# Altium PCB rNET_POE_Sensor_RevA1.PCBDOC (part 1 of 3)
Units mil, origin at the board's own origin, x right, y up, seen from the top; angles counter-clockwise.
Board outline 3750 x 2245 mil, 6 copper layers (TopLayer, Mid Layer 1, Mid Layer 2, Mid Layer 3, Mid Layer 4, BottomLayer), stack 60.4 mil thick; 269 components, 206 nets, 1048 pads, 579 vias.
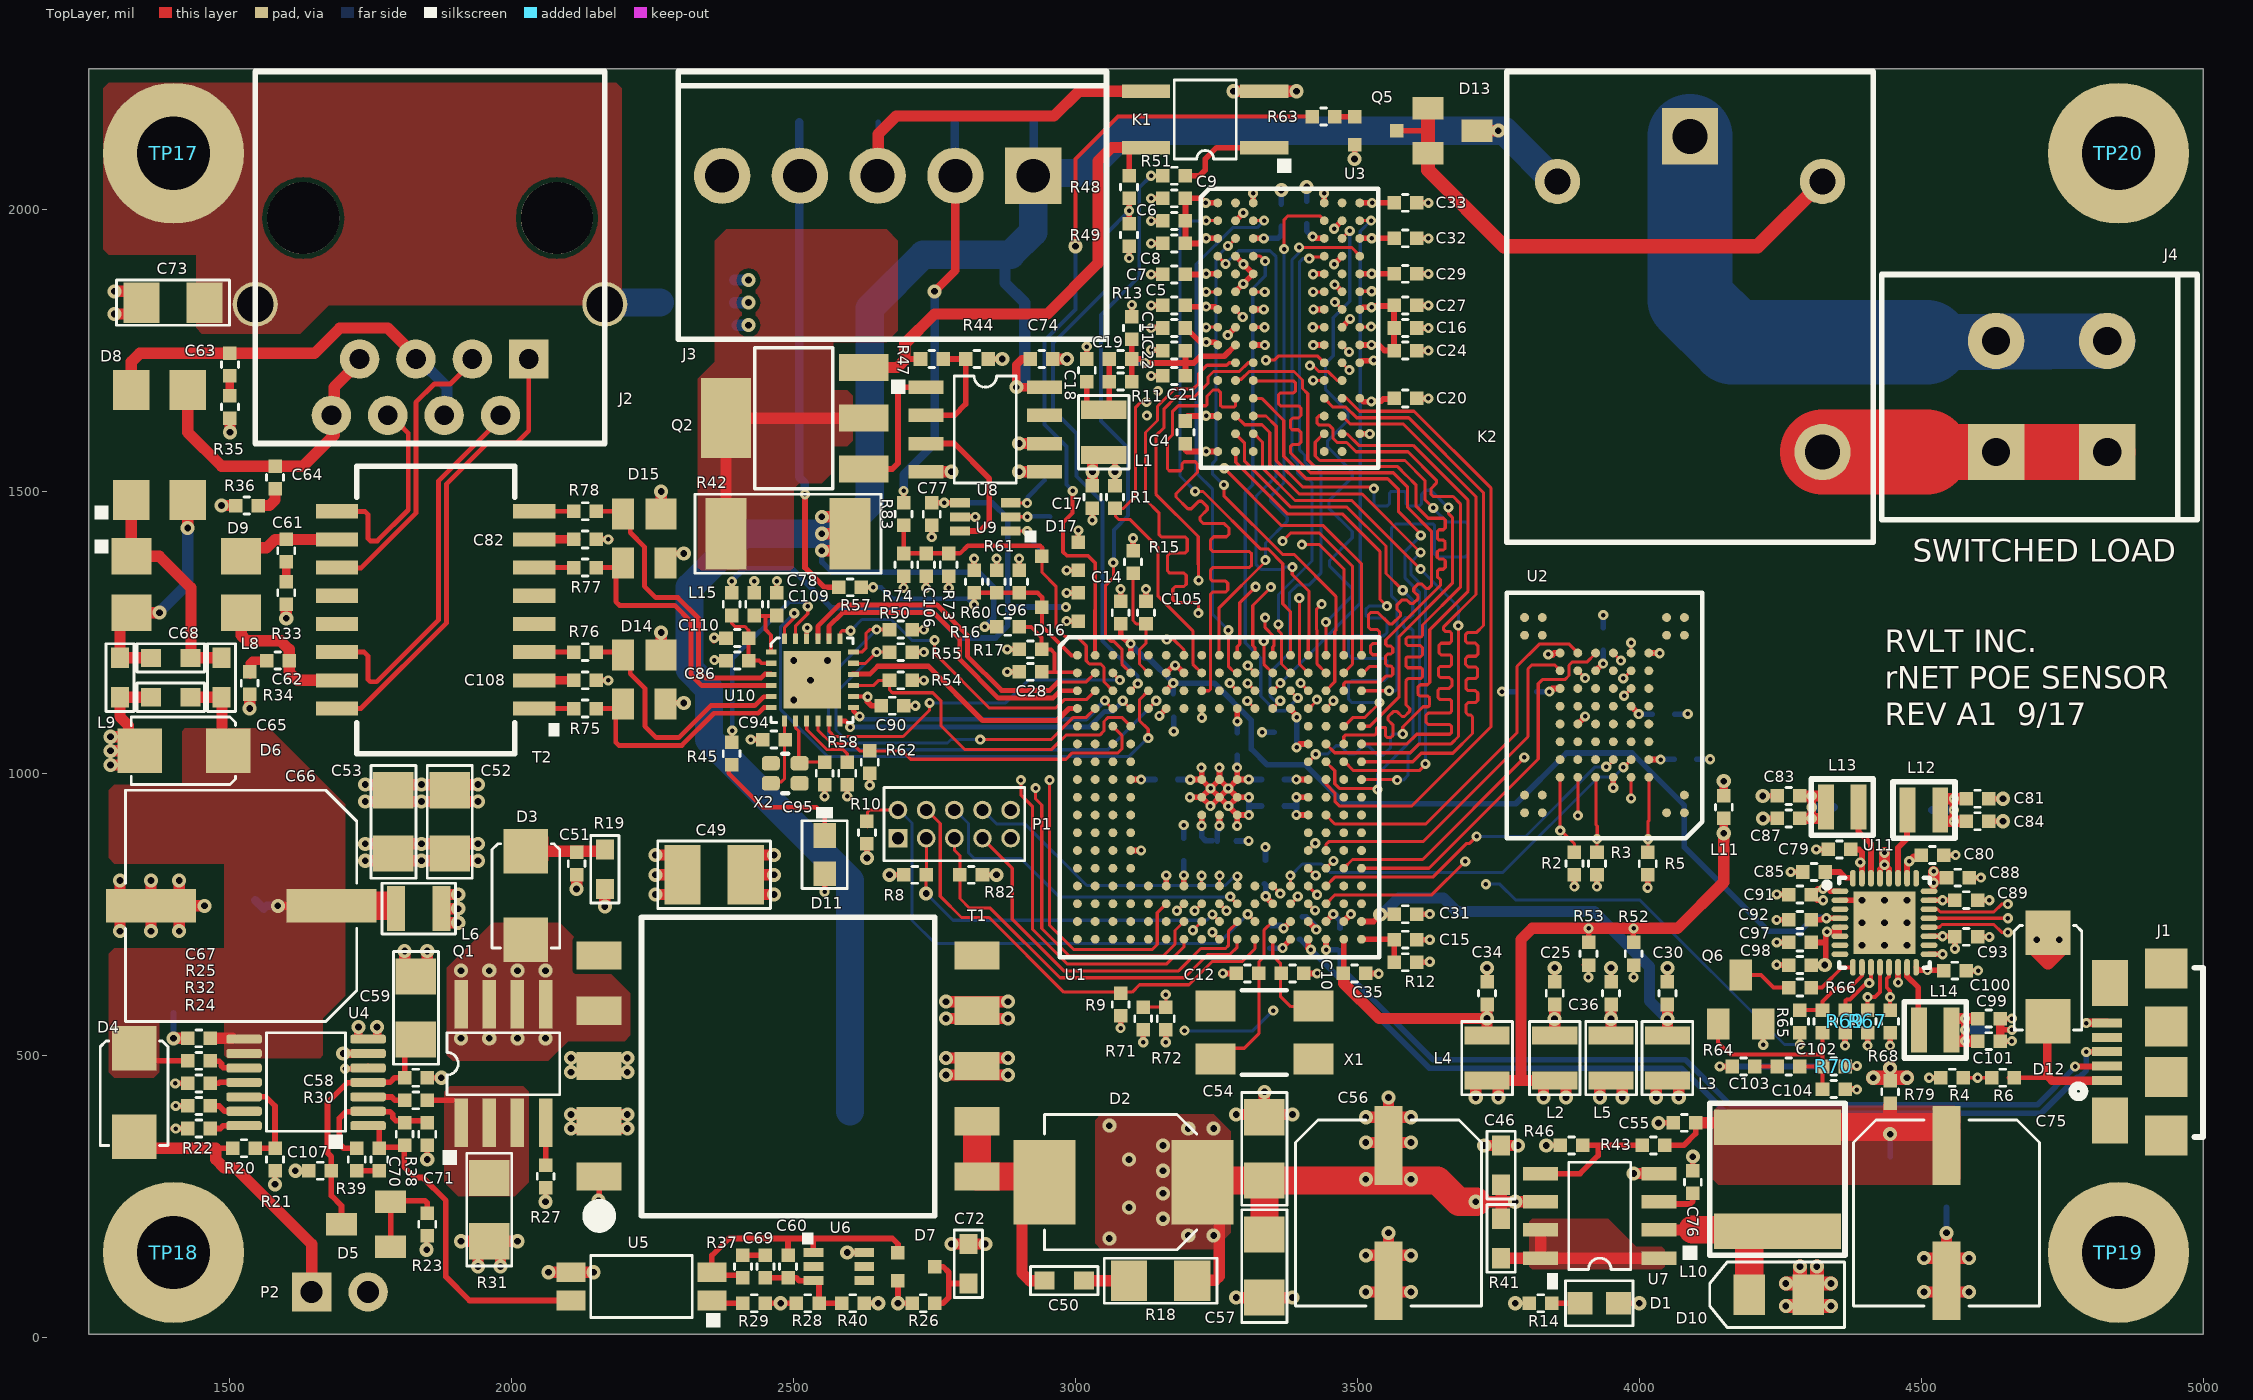
[diagram p0: TopLayer view]
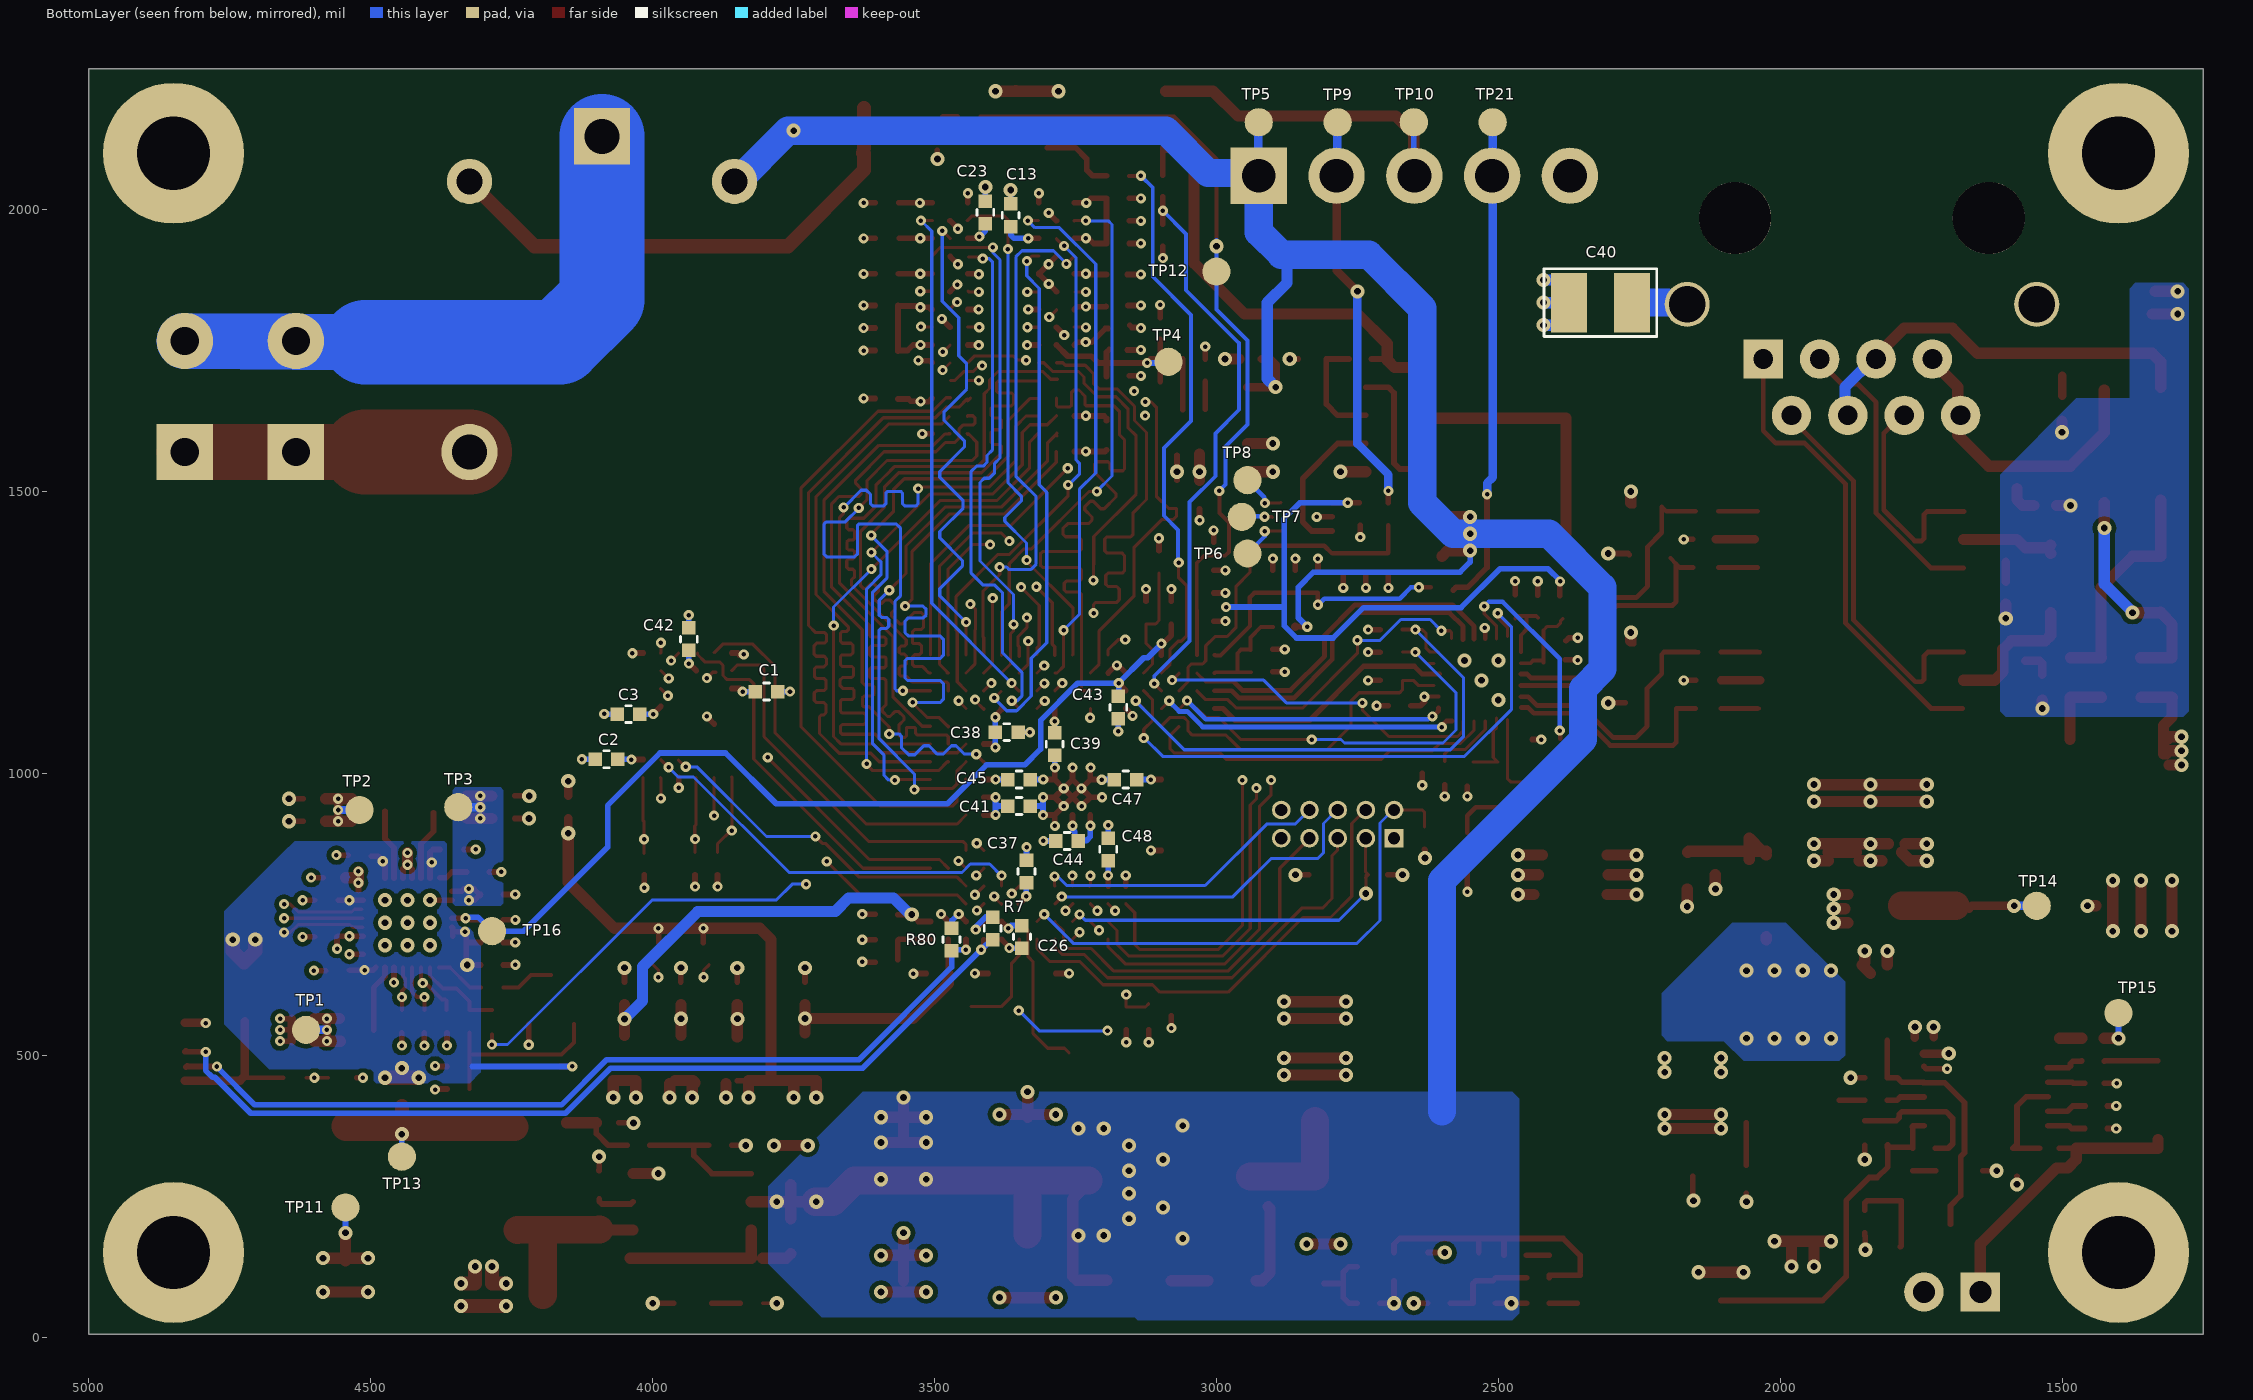
[diagram p1: BottomLayer view, seen from below]
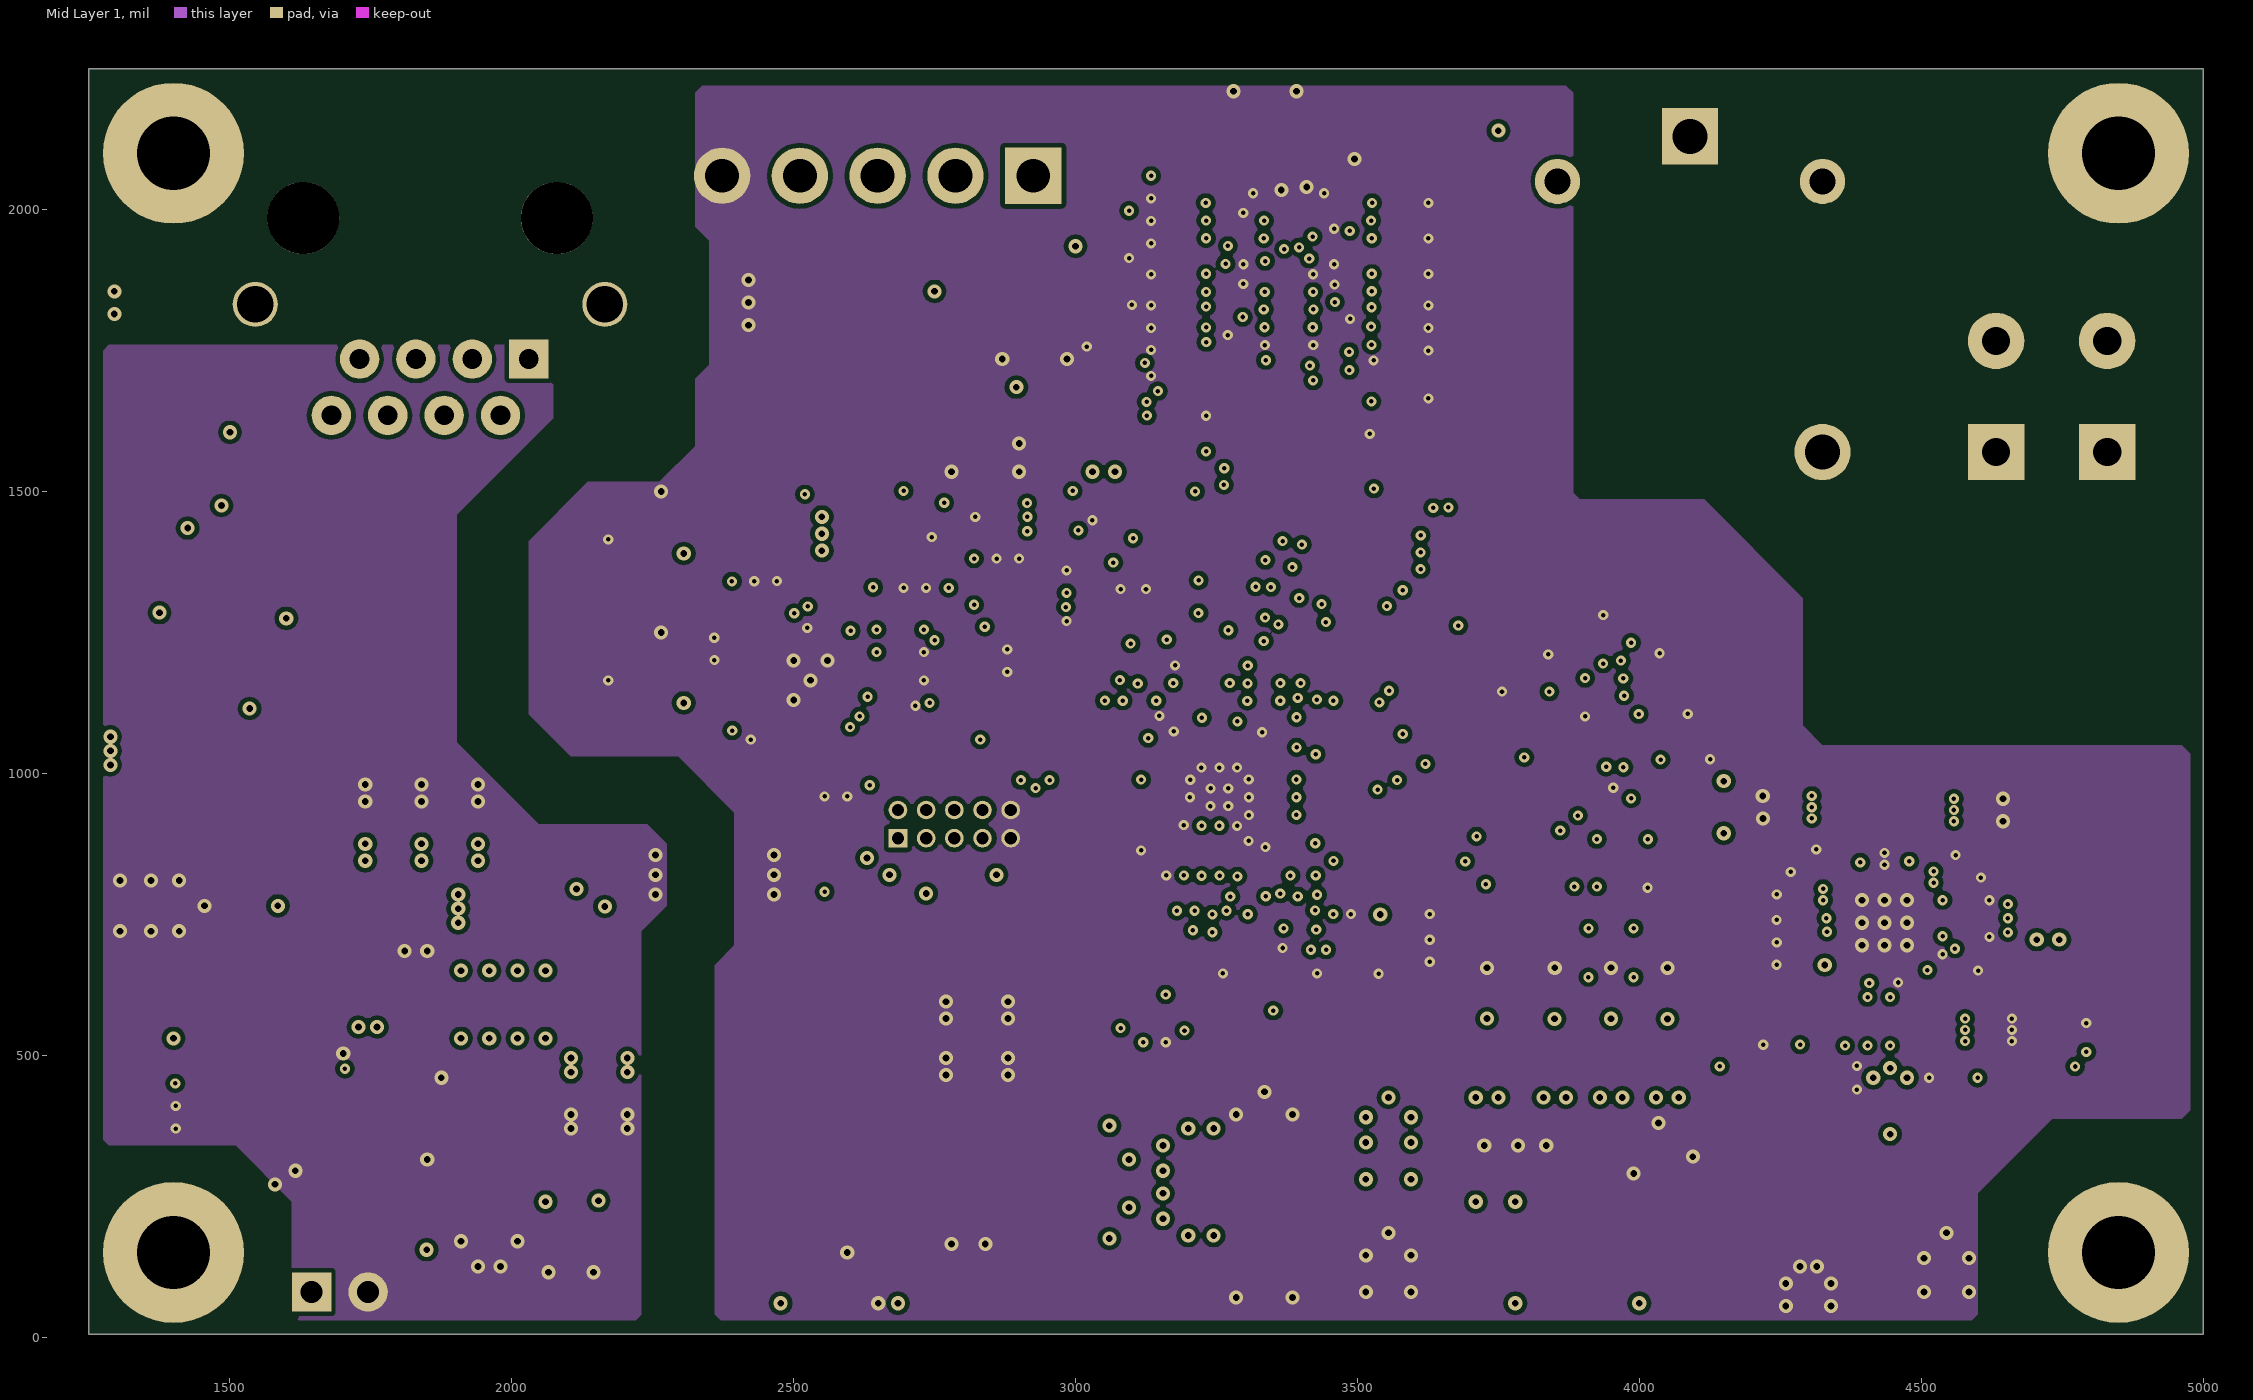
[diagram p2: Mid Layer 1]
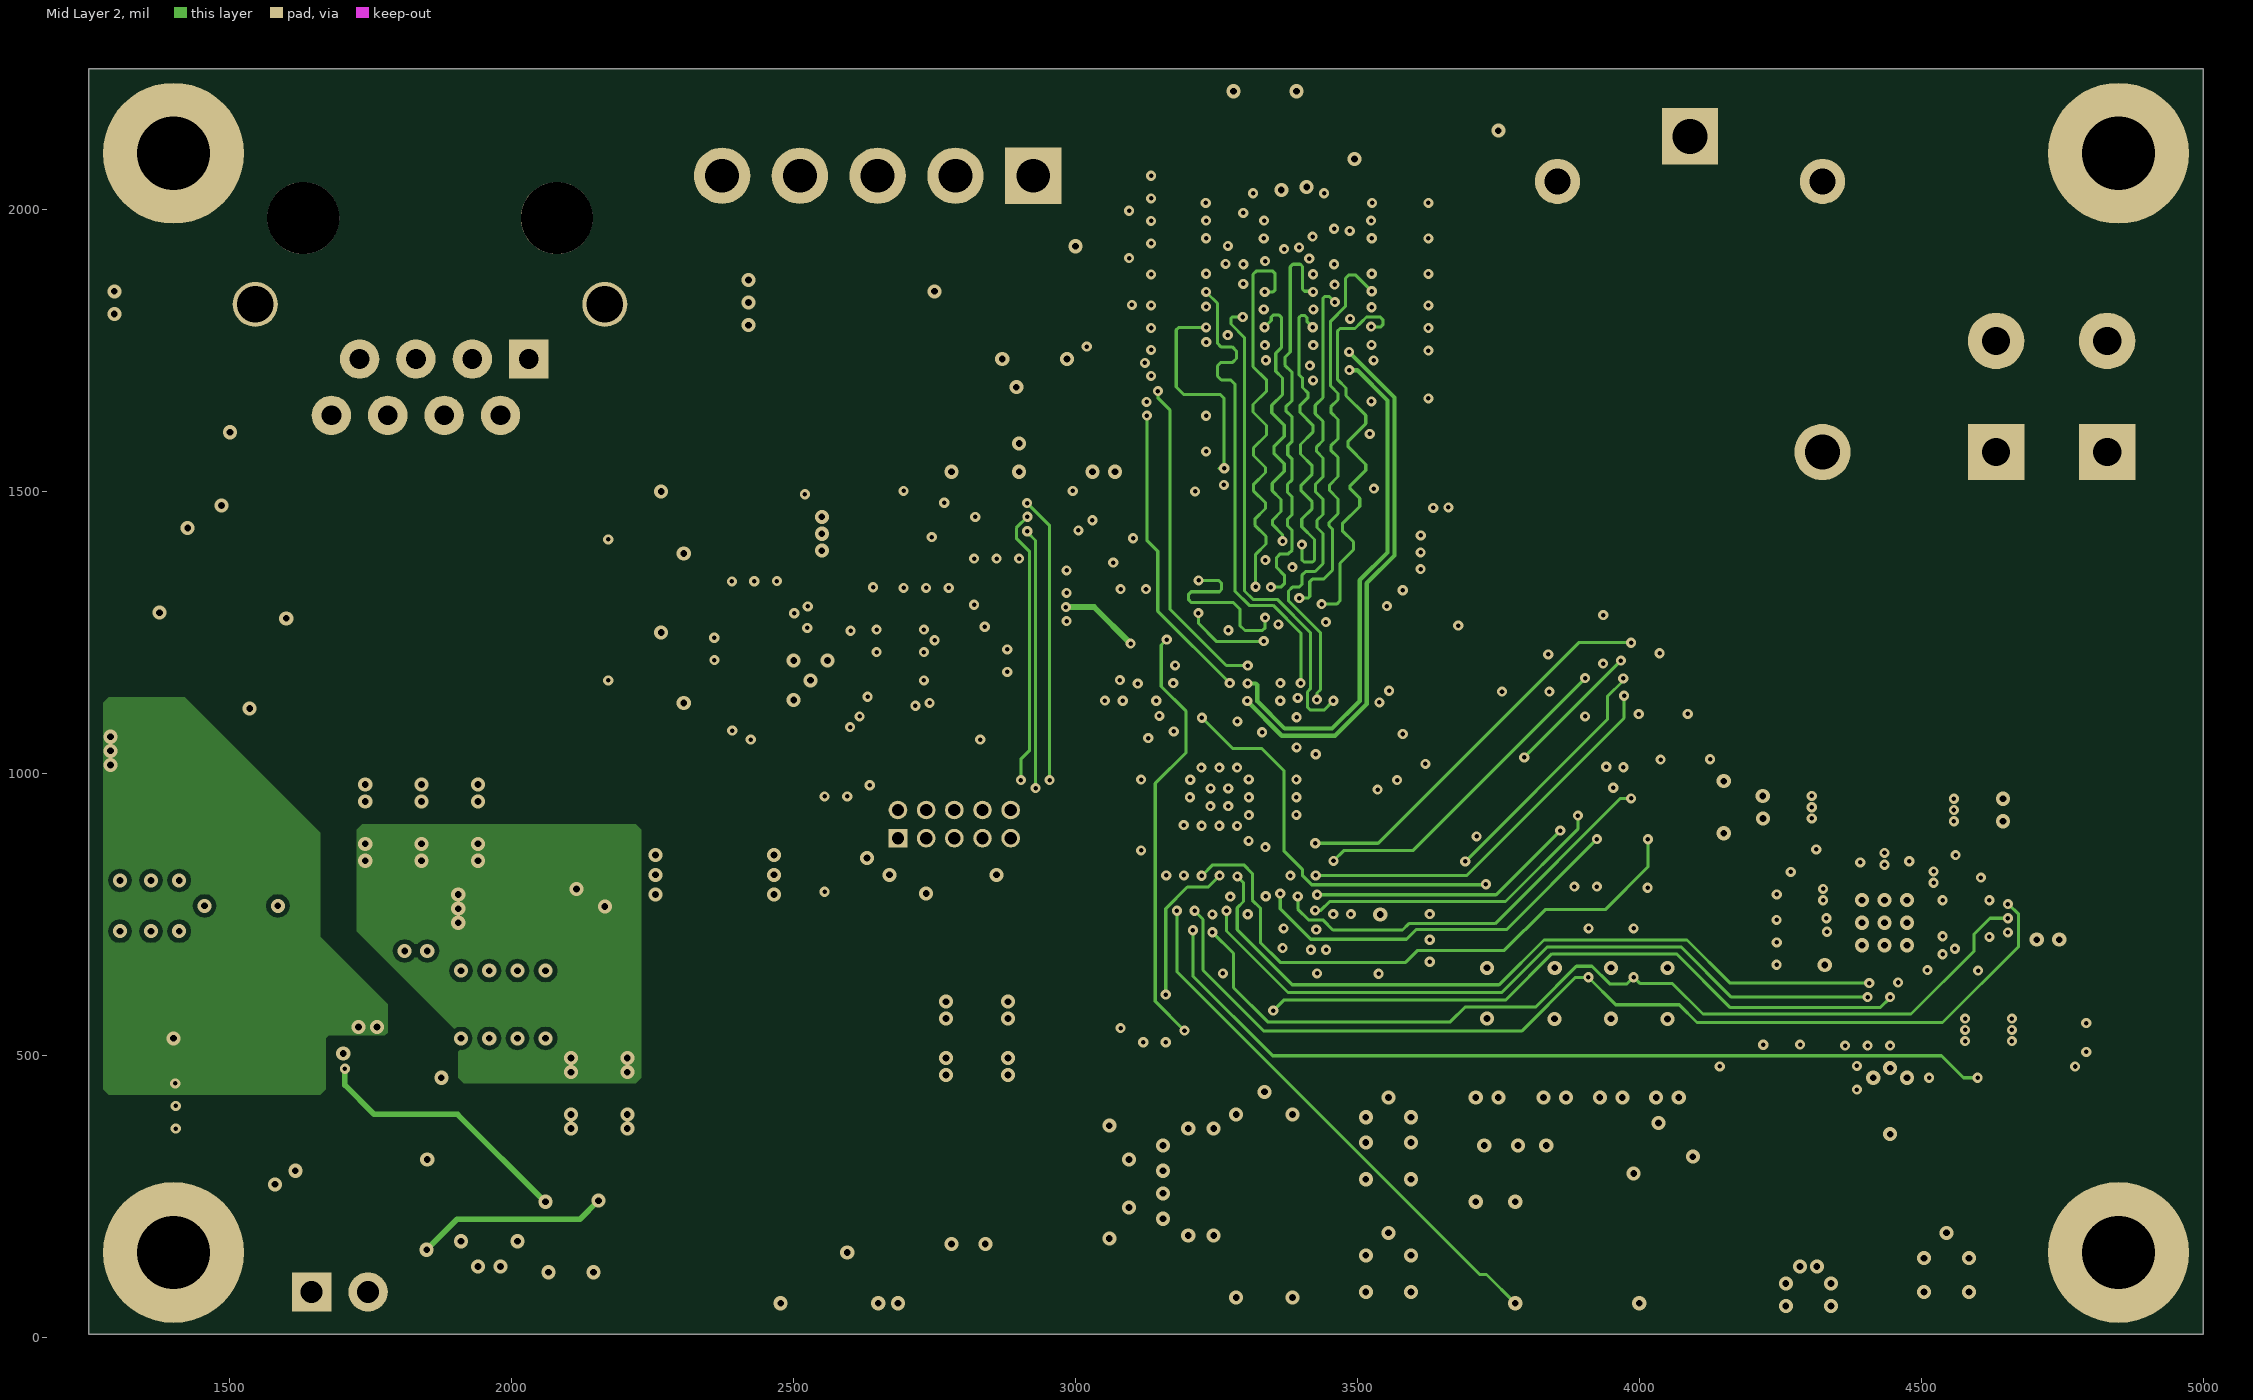
[diagram p3: Mid Layer 2]
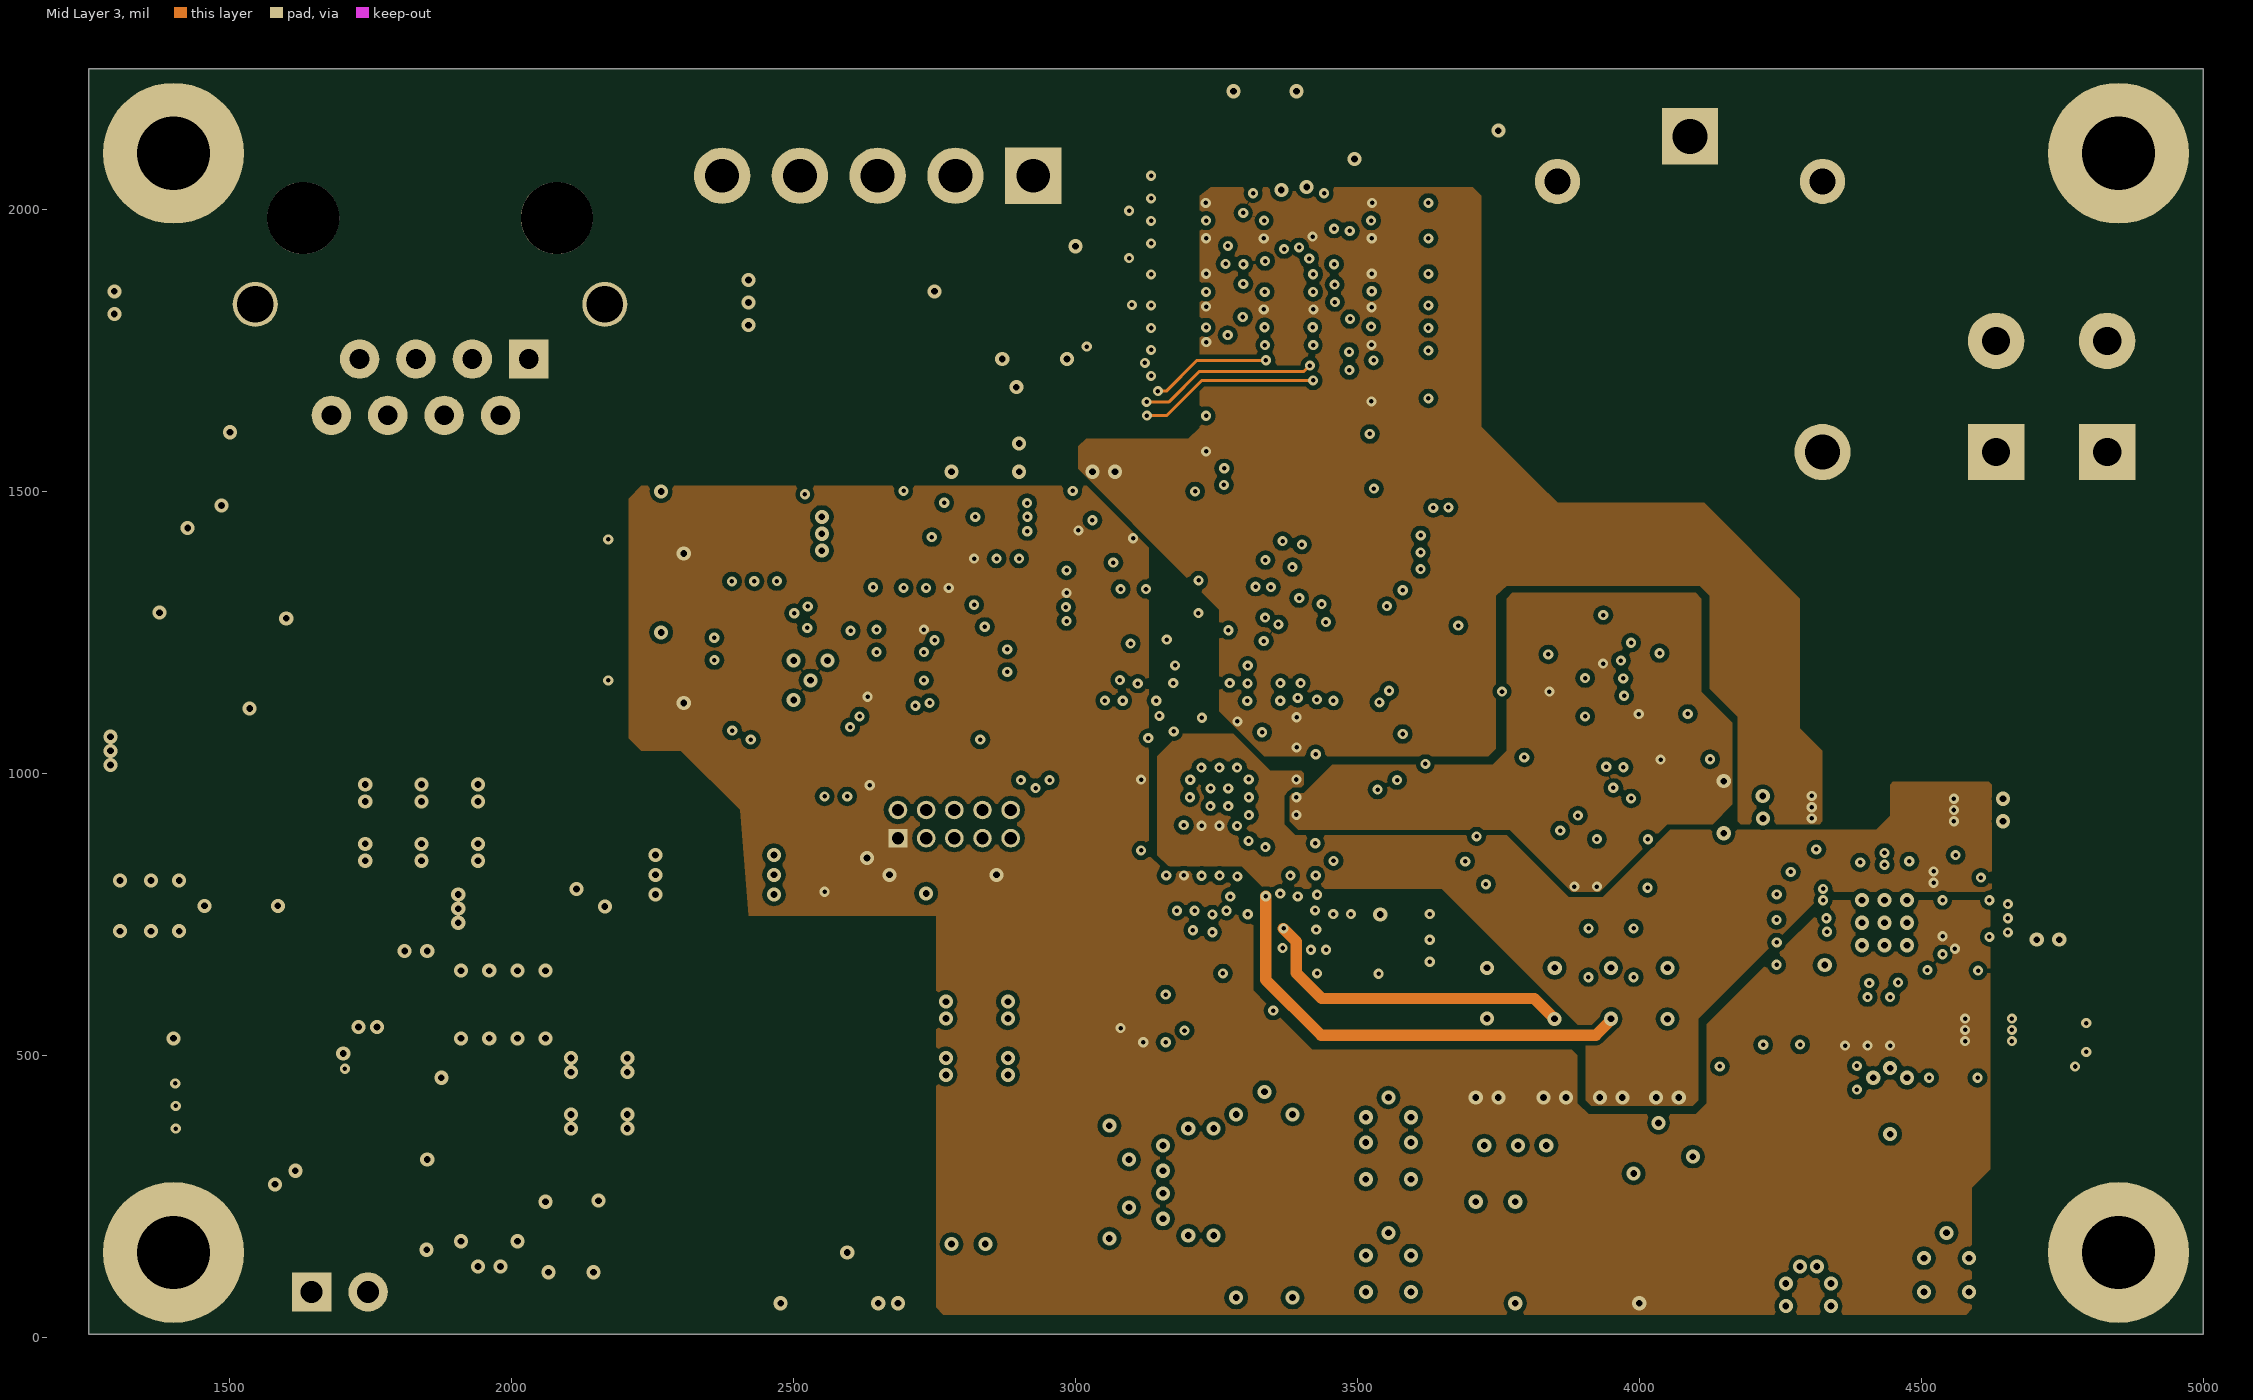
[diagram p4: Mid Layer 3]
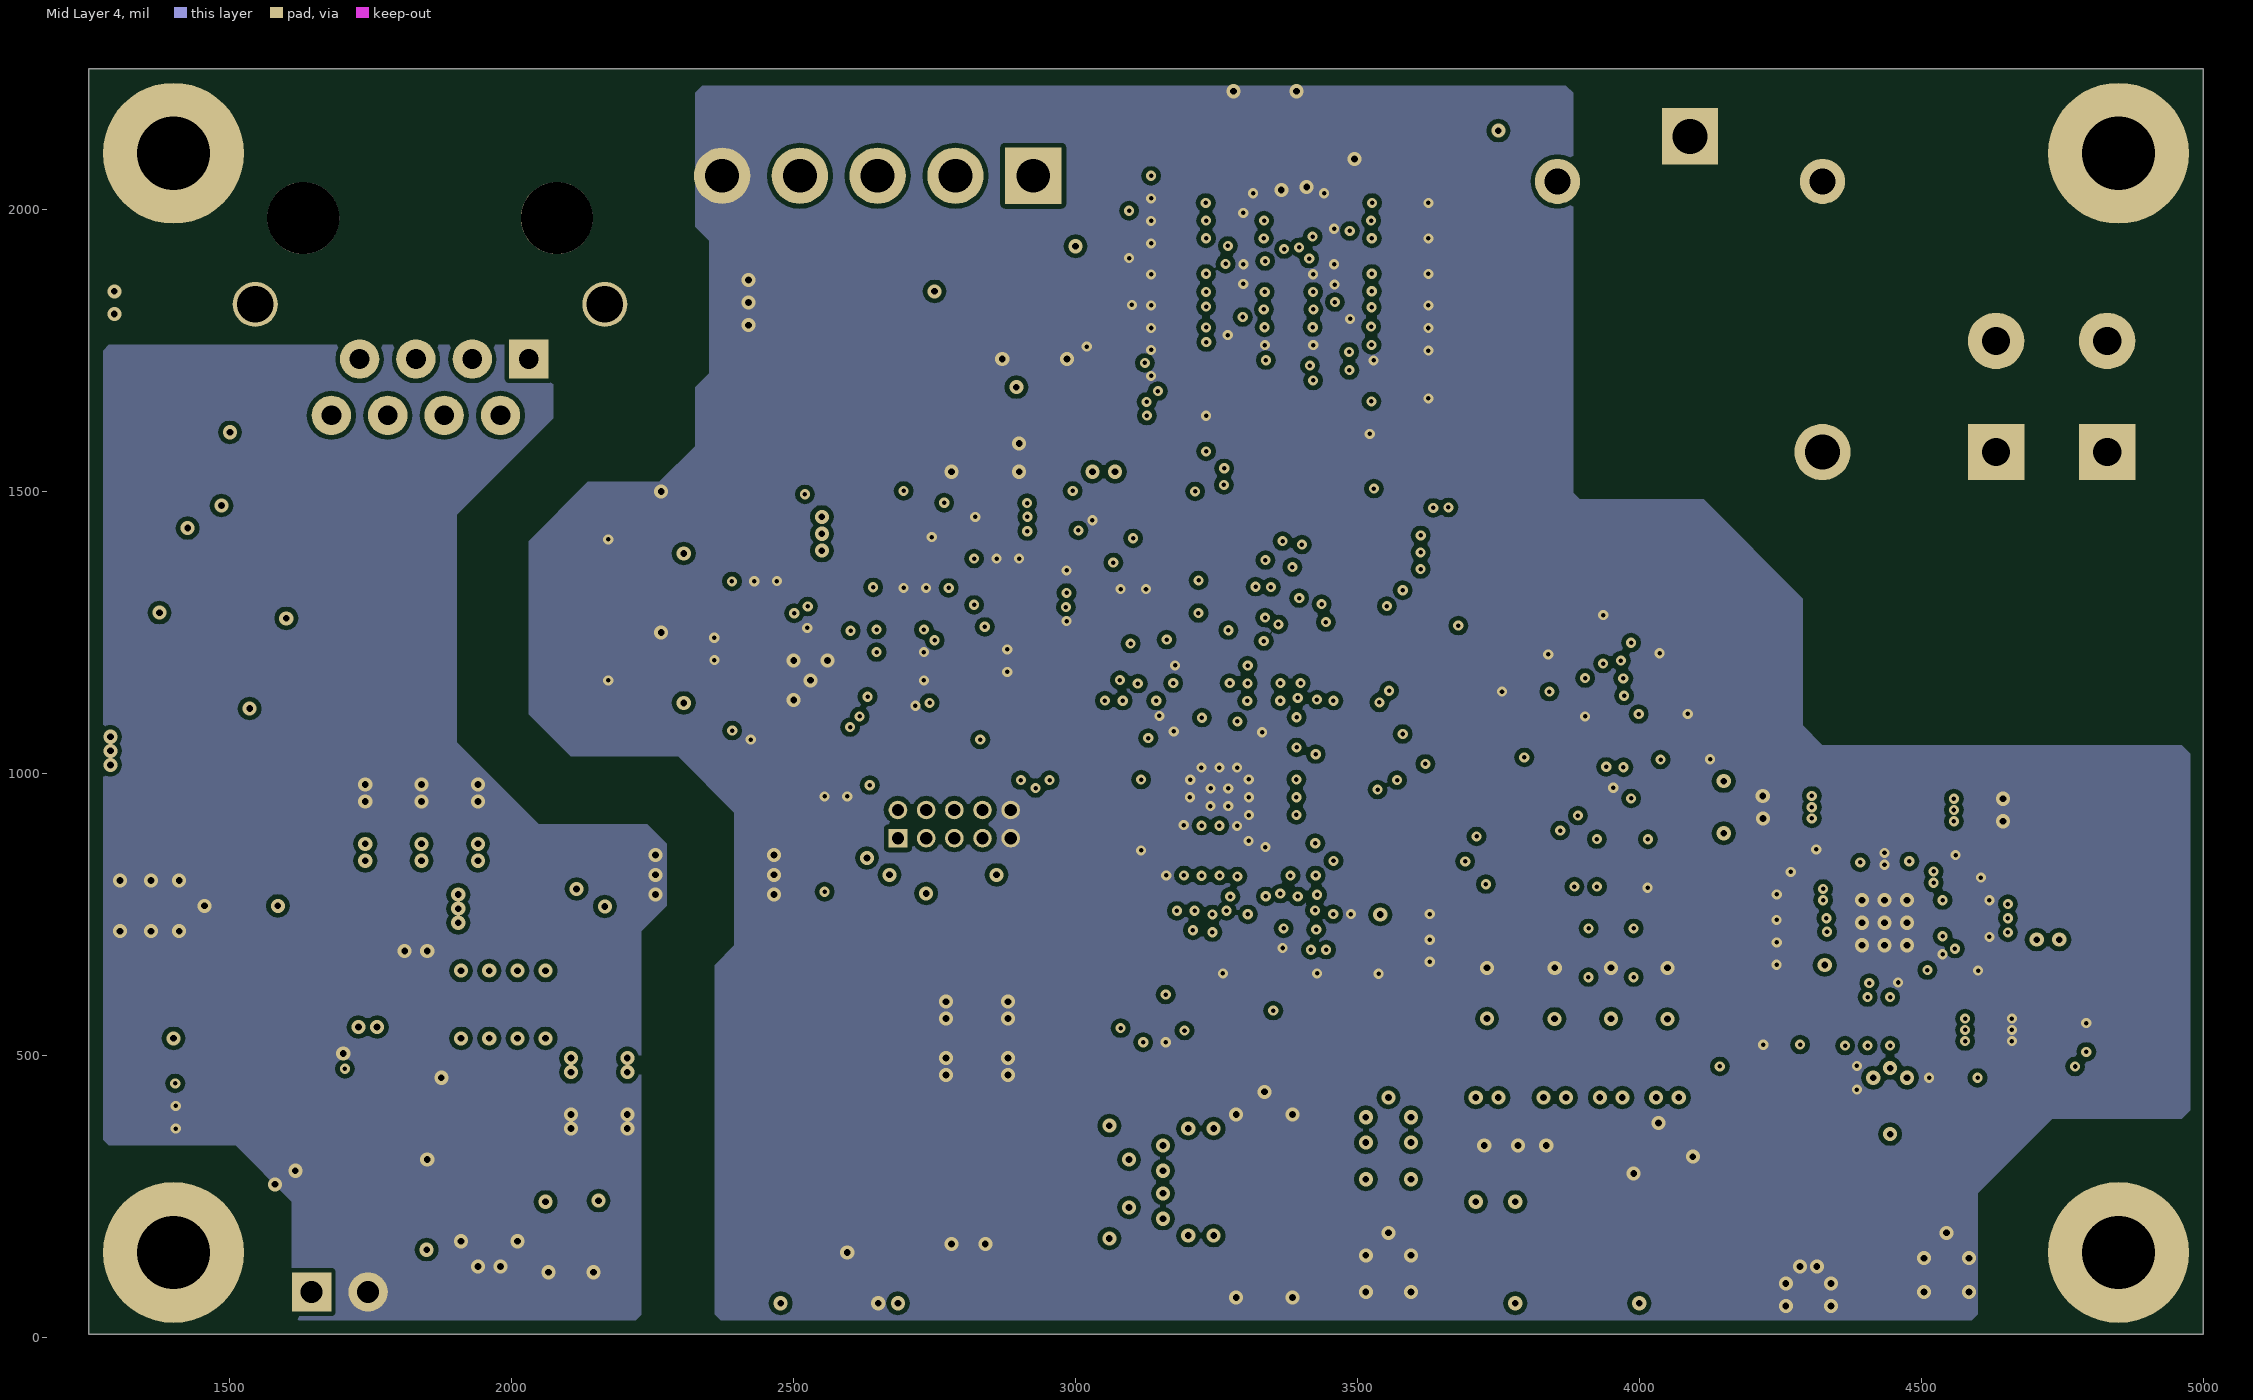
[diagram p5: Mid Layer 4]

## Layer stack, top to bottom
TopSolder: solder mask 0.4, Solder Resist, Dk 3.5
TopLayer: signal copper 1.4
Dielectric1: prepreg 5, FR-4, Dk 4.2
Mid Layer 1: signal copper 1.4
Dielectric2: prepreg 5, FR-4, Dk 4.2
Mid Layer 2: signal copper 1.4
Dielectric3: core 32, FR-4, Dk 4.2
Mid Layer 3: signal copper 1.4
Dielectric 5: prepreg 5, FR-4, Dk 4.2
Mid Layer 4: signal copper 1.4
Dielectric 4: prepreg 5, FR-4, Dk 4.2
BottomLayer: signal copper 1.4
BottomSolder: solder mask 0.4, Solder Resist, Dk 3.5

## Board outline
1250,5 1250,2250 5000,2250 5000,5

## Design rules (kind name [scope] priority, off if disabled: settings)
Clearance "Polygon Clearance" [InPolygon] p1: gap=8 ignorepadtopadclearanceinfootprint=FALSE except(0: Arc-Hole Track-Hole SMDPad-Hole THPad-Hole Via-Hole Fill-Hole Poly-Hole Region-Hole Text-Hole)
Clearance Clearance_1 [(InComponent('U1') OR InComponent('U2') OR InComponent('U3'))] p2: gap=5 ignorepadtopadclearanceinfootprint=FALSE except(0: Arc-Hole Track-Hole SMDPad-Hole THPad-Hole Via-Hole Fill-Hole Poly-Hole Region-Hole Text-Hole)
Clearance [All] p3: gap=5 ignorepadtopadclearanceinfootprint=FALSE except(0: Arc-Hole Track-Hole SMDPad-Hole THPad-Hole Via-Hole Fill-Hole Poly-Hole Region-Hole Text-Hole)
FabricationTestPointUsage TestPointUsage [All] p1: valid=0 allowmultiple=FALSE
FabricationTestpoint Testpoint [All] p1: side=3 testpointundercomponent=TRUE minsize=40 maxsize=100 preferedsize=60 minholesize=20 maxholesize=40 preferedholesize=32 testpointgrid=1 allowsidetop=TRUE allowsidebottom=TRUE usegrid=TRUE gridtolerance=0.01
MatchedLengths [InNet('DDR2_DQM1') AND InNet('DDR2_DQS1') AND InNet('DQ15') AND InNet('DQ14') AND InNet('DQ13') AND InNet('DQ12') AND InNet('DQ11') AND InNet('DQ10') AND InNet('DQ9') AND InNet('DQ8')] p1: tolerance=50 checknetsindiffpair=FALSE checkdiffpairvsdiffpair=TRUE checkxsignals=TRUE checkothers=TRUE
MinimumAnnularRing [All] p1: minimumring=10
PasteMaskExpansion PasteMaskExpansion_1 [All] p1: expansion=0
PasteMaskExpansion [All] p2: expansion=0
PlaneConnect [All] p1: planeconnectstyle=Direct reliefexpansion=20 reliefentries=4 reliefconductorwidth=10 reliefairgap=10
PolygonConnect PolygonConnect_C51_2 [InNet('NetC51_2')] p1: connectstyle=Direct reliefconductorwidth=10 reliefentries=4 polygonreliefangle="90 Angle" airgapwidth=10
PolygonConnect PolygonConnect_D3_1 [InNet('NetD3_1')] p2: connectstyle=Direct reliefconductorwidth=10 reliefentries=4 polygonreliefangle="90 Angle" airgapwidth=10
PolygonConnect PolygonConnect_PGND [InNet('PGND')] p3: connectstyle=Direct reliefconductorwidth=10 reliefentries=4 polygonreliefangle="90 Angle" airgapwidth=10
PolygonConnect PolygonConnect_Q1_1 [InNet('NetQ1_1')] p4: connectstyle=Direct reliefconductorwidth=10 reliefentries=4 polygonreliefangle="90 Angle" airgapwidth=10
PolygonConnect PolygonConnect_GNDDIG [(InNet('GND') AND OnLayer('Mid Layer 1'))] p5: connectstyle=Direct reliefconductorwidth=10 reliefentries=4 polygonreliefangle="90 Angle" airgapwidth=10
PolygonConnect PolygonConnect_C65_2 [(InNet('NetC65_2'))] p6: connectstyle=Direct reliefconductorwidth=10 reliefentries=4 polygonreliefangle="90 Angle" airgapwidth=10
PolygonConnect PolygonConnect_Chassis [InNet('CHASSIS')] p7: connectstyle=Direct reliefconductorwidth=10 reliefentries=4 polygonreliefangle="90 Angle" airgapwidth=10
PolygonConnect PolygonConnect_C73_2 [InNet('NetC73_2')] p8: connectstyle=Direct reliefconductorwidth=10 reliefentries=4 polygonreliefangle="90 Angle" airgapwidth=10
PolygonConnect PolygonConnect_C65_1 [InNet('NetC65_1')] p9: connectstyle=Direct reliefconductorwidth=10 reliefentries=4 polygonreliefangle="90 Angle" airgapwidth=10
PolygonConnect PolygonConnect_+24V [InNet('+24V')] p10: connectstyle=Direct reliefconductorwidth=10 reliefentries=4 polygonreliefangle="90 Angle" airgapwidth=10
PolygonConnect PolygonConnect_3.3VNF [InNet('+3.3VNF')] p11: connectstyle=Direct reliefconductorwidth=10 reliefentries=4 polygonreliefangle="90 Angle" airgapwidth=10
PolygonConnect PolygonConnect_1.8V [InNet('+1.8V')] p12: connectstyle=Direct reliefconductorwidth=10 reliefentries=4 polygonreliefangle="90 Angle" airgapwidth=10
PolygonConnect PolygonConnect_1.0V [InNet('+1.0V')] p13: connectstyle=Direct reliefconductorwidth=10 reliefentries=4 polygonreliefangle="90 Angle" airgapwidth=10
PolygonConnect PolygonConnect_5V [InNet('+5V')] p14: connectstyle=Direct reliefconductorwidth=10 reliefentries=4 polygonreliefangle="90 Angle" airgapwidth=10
PolygonConnect PolygonConnect_R41 [InNet('NetR41_2')] p15: connectstyle=Direct reliefconductorwidth=10 reliefentries=4 polygonreliefangle="90 Angle" airgapwidth=10
PolygonConnect PolygonConnect_C55_2 [InNet('NetC55_2')] p16: connectstyle=Direct reliefconductorwidth=10 reliefentries=4 polygonreliefangle="90 Angle" airgapwidth=10
PolygonConnect PolygonConnect_Q2 [InNet('NetQ2_2')] p17: connectstyle=Direct reliefconductorwidth=10 reliefentries=4 polygonreliefangle="90 Angle" airgapwidth=10
PolygonConnect PolygonConnect_3.3V [InNet('+3.3V')] p18: connectstyle=Direct reliefconductorwidth=10 reliefentries=4 polygonreliefangle="90 Angle" airgapwidth=10
PolygonConnect "PolygonConnect Mid Layer 1" [OnLayer('Mid Layer 1')] p19: connectstyle=Direct reliefconductorwidth=10 reliefentries=4 polygonreliefangle="90 Angle" airgapwidth=10
PolygonConnect "PolygonConnect Mid Layer 4" [OnLayer('Mid Layer 4')] p20: connectstyle=Direct reliefconductorwidth=10 reliefentries=4 polygonreliefangle="90 Angle" airgapwidth=10
PolygonConnect [All] p21: connectstyle=Relief reliefconductorwidth=10 reliefentries=4 polygonreliefangle="90 Angle" airgapwidth=10
RoutingPriority RoutingPriority_1 [InNet('GND')] p1: routingpriority=19
RoutingPriority [All] p2: routingpriority=0
RoutingVias [All] p1: holewidth=12 width=25 viastyle="Through Hole" minholewidth=12 minwidth=25 maxholewidth=12 maxwidth=25
SilkToSolderMaskClearance SilkscreenOverComponentPads [IsPad] p1: minsilkscreentomaskgap=10 clearancetoexposedcopper=TRUE
SolderMaskExpansion SolderMaskExpansion_1 [All] p1: expansion=4
SolderMaskExpansion [All] p2: expansion=2
UnRoutedNet UnRoutedNet_1 [All] p1:
UnRoutedNet [All] p2:
Width WIDTH [All] p1: maxlimit=250 minlimit=5.5 preferedwidth=10 midlayer3_maxwidth=100 midlayer4_maxwidth=100 minimp=50.000000 maximp=50.000000 favimp=50.000000
23 further rules are at their usual default settings.

## Classes and differential pairs
component class rNET_POE_Sensor._Sheet2_RevA1: C40 C46 C49 C50 C51 C52 C53 C54 C55 C56 C57 C58 C59 C60 C61 C62 C63 C64 C65 C66 C67 C68 C69 C70 C71 C72 C73 C74 C75 C76 C77 C78 C79 C80 C81 C82 C83 C84 C85 C86 C87 C88 C89 C90 C91 C92 C93 C94 C95 C96 C97 C98 C99 C100 C101 C102 C103 C104 C106 C107 C108 C109 C110 D2 D3 D4 D5 D6 D7 D8 D9 D10 D11 D13 D14 D15 D16 D17 J2 J3 J4 K1 K2 L6 L8 L9 L10 L12 L13 L14 L15 P2 Q1 Q2 Q5 Q6 R18 R19 R20 R21 R22 R23 R24 R25 R26 R27 R28 R29 R30 R31 R32 R33 R34 R35 R36 R37 R38 R39 R40 R41 R42 R43 R44 R45 R46 R47 R48 R49 R50 R51 R52 R53 R54 R55 R57 R58 R60 R61 R62 R63 R64 R65 R66 R67 R68 R69 R70 R73 R74 R75 R76 R77 R78 R79 R83 T1 T2 TP5 TP6 TP7 TP8 TP9 TP10 TP11 TP12 TP13 TP14 TP15 TP16 TP17 TP18 TP19 TP20 TP21 U4 U5 U6 U7 U8 U9 U10 U11 X2
component class rNET_POE_Sensor._Sheet1_RevA1: C1 C2 C3 C4 C5 C6 C7 C8 C9 C10 C11 C12 C13 C14 C15 C16 C17 C18 C19 C20 C21 C22 C23 C24 C25 C26 C27 C28 C29 C30 C31 C32 C33 C34 C35 C36 C37 C38 C39 C41 C42 C43 C44 C45 C47 C48 C105 D1 D12 J1 L1 L2 L3 L4 L5 L11 P1 R1 R2 R3 R4 R5 R6 R7 R8 R9 R10 R11 R12 R13 R14 R15 R16 R17 R71 R72 R80 R82 TP1 TP2 TP3 TP4 U1 U2 U3 X1
net class Undefined: DDR2_DQM0 DDR2_DQS0 DQ0 DQ1 DQ2 DQ3 DQ4 DQ5 DQ6 DQ7

## Components (designator, comment, footprint, x,y, rotation, side; value= is the part's Value field where it differs from the comment)
C1 "0.1uF" 0402NOM 3798,1145 r0 bottom value={Value}
C2 "0.1uF" 0402NOM 4082,1025 r180 bottom value={Value}
C3 "0.1uF" 0402NOM 4043,1105 r180 bottom value={Value}
C4 "0.1uF" 0402NOM 3195,1605 r270 top value={Value}
C5 "0.1uF" 0402NOM 3175,1830 r0 top value={Value}
C6 "0.1uF" 0402NOM 3175,1980 r0 top value={Value}
C7 "0.1uF" 0402NOM 3175,1885 r0 top value={Value}
C8 "0.1uF" 0402NOM 3175,1940 r0 top value={Value}
C9 "0.1uF" 0402NOM 3175,2020 r0 top value={Value}
C10 "15pF" 0402NOM 3385,645 r180 top value={Value}
C11 "0.1uF" 0402NOM 3175,1790 r0 top value={Value}
C12 "15pF" 0402NOM 3305,645 r0 top value={Value}
C13 "0.1uF" 0402NOM 3365,1990 r270 bottom value={Value}
C14 "0.1uF" 0402NOM 3080,1285 r270 top value={Value}
C15 "10pF" 0402NOM 3585,705 r180 top value={Value}
C16 "0.1uF" 0402NOM 3585,1790 r180 top value={Value}
C17 "2.2uF 10V" 0402NOM 3030,1490 r90 top value={Value}
C18 "2.2uF 10V" 0402NOM 3020,1715 r270 top value={Value}
C19 "0.1uF" 0402NOM 3080,1735 r180 top value={Value}
C20 "0.1uF" 0402NOM 3585,1665 r180 top value={Value}
C21 "0.1uF" 0402NOM 3175,1705 r0 top value={Value}
C22 "0.1uF" 0402NOM 3175,1750 r0 top value={Value}
C23 "0.1uF" 0402NOM 3410,1995 r270 bottom value={Value}
C24 "0.1uF" 0402NOM 3585,1750 r180 top value={Value}
C25 "2.2uF 10V" 0402NOM 3850,610 r270 top value={Value}
C26 "0.1uF" 0402NOM 3345,710 r90 bottom value={Value}
C27 "0.1uF" 0402NOM 3585,1830 r180 top value={Value}
C28 "0.1uF" 0402NOM 2920,1180 r0 top value={Value}
C29 "0.1uF" 0402NOM 3585,1886 r180 top value={Value}
C30 "2.2uF 10V" 0402NOM 4050,610 r270 top value={Value}
C31 "0.1uF" 0402NOM 3585,750 r180 top value={Value}
C32 "0.1uF" 0402NOM 3585,1949 r180 top value={Value}
C33 "0.1uF" 0402NOM 3585,2012 r180 top value={Value}
C34 "2.2uF 10V" 0402NOM 3730,610 r270 top value={Value}
C35 "0.1uF" 0402NOM 3495,645 r180 top value={Value}
C36 "2.2uF 10V" 0402NOM 3950,610 r270 top value={Value}
C37 "0.1uF" 0402NOM 3337,826 r270 bottom value={Value}
C38 "0.1uF" 0402NOM 3372,1073 r0 bottom value={Value}
C39 "0.1uF" 0402NOM 3287,1052 r90 bottom value={Value}
C40 "2200pF 2KV" 1210 2375,1835 r180 bottom value={Value}
C41 "0.1uF" 0402NOM 3350,942 r0 bottom value={Value}
C42 "0.1uF" 0402NOM 3936,1238 r270 bottom value={Value}
C43 "0.1uF" 0402NOM 3174,1117 r90 bottom value={Value}
C44 "0.1uF" 0402NOM 3265,880 r180 bottom value={Value}
C45 "0.1uF" 0402NOM 3350,989 r0 bottom value={Value}
C46 "1uF 35V" 0603LEAST 3755,305 r90 top value={Value}
C47 "0.1uF" 0402NOM 3161,989 r180 bottom value={Value}
C48 "0.1uF" 0402NOM 3192,865 r270 bottom value={Value}
C49 "2200pF 2KV" 1210 2415,820 r180 top value={Value}
C50 "680pF" 0603LEAST 2980,100 r180 top value={Value}
C51 "0.1uF 100V" 0402NOM 2115,840 r270 top value={Value}
C52 "1uF 100V" 1206 1890,970 r270 top value={Value}
C53 "1uF 100V" 1206 1790,970 r270 top value={Value}
C54 "10uF 35V" 1206 3335,390 r270 top value={Value}
C55 "10uF 6.3V" 0402NOM 4080,380 r0 top value={Value}
C56 "100uF 35V" CAP_AL_SMD_8.3MM 3555,220 r90 top value={Value}
C57 "1uF 100V" 1206 3335,70 r90 top value={Value}
C58 "0.1uF" 0402NOM 1830,460 r180 top value={Value}
C59 "10uF 35V" 1206 1830,640 r270 top value={Value}
C60 "100pF" 0402NOM 2490,125 r90 top value={Value}
C61 ".01uF" 0402NOM 1600,1395 r90 top value={Value}
C62 ".01uF" 0402NOM 1585,1200 r0 top value={Value}
C63 ".01uF" 0402NOM 1500,1725 r90 top value={Value}
C64 ".01uF" 0402NOM 1580,1525 r90 top value={Value}
C65 "1000pF 100V" 0603LEAST 1395,1135 r180 top value={Value}
C66 "22uF 100V" CAP_AL_SMD_10.3MM 1520,765 r0 top value={Value}
C67 "0.1uF 100V" 0402NOM 1445,530 r0 top value={Value}
C68 "1000pF 100V" 0603LEAST 1395,1205 r180 top value={Value}
C69 ".01uF" 0402NOM 2450,125 r90 top value={Value}
C70 "15nF" 0402NOM 1765,315 r90 top value={Value}
C71 "0.1uF" 0402NOM 1850,360 r90 top value={Value}
C72 "1uF 35V" 0603LEAST 2810,130 r90 top value={Value}
C73 "1000pF 2KV" 1206 1455,1835 r180 top value={Value}
C74 "0.1uF 100V" 0402NOM 2940,1735 r180 top value={Value}
C75 "470uF 16V" CAP_AL_SMD_8.3MM 4545,220 r90 top value={Value}
C76 "470pF" 0402NOM 4095,275 r270 top value={Value}
C77 "0.1uF" 0402NOM 2745,1460 r90 top value={Value}
C78 "2.2uF 10V" 0402NOM 2430,1300 r270 top value={Value}
C79 "2.2uF 10V" 0402NOM 4355,865 r180 top value={Value}
C80 "2.2uF 10V" 0402NOM 4520,855 r180 top value={Value}
C81 "10uF 6.3V" 0402NOM 4600,955 r180 top value={Value}
C82 "0.1uF" 0402NOM 2130,1415 r180 top value={Value}
C83 "10uF 6.3V" 0402NOM 4265,960 r0 top value={Value}
C84 "10uF 6.3V" 0402NOM 4600,915 r180 top value={Value}
C85 "0.047uF" 0402NOM 4310,825 r0 top value={Value}
C86 "0.1uF" 0402NOM 2400,1200 r0 top value={Value}
C87 "10uF 6.3V" 0402NOM 4265,920 r0 top value={Value}
C88 "0.1uF" 0402NOM 4565,815 r180 top value={Value}
C89 "0.1uF" 0402NOM 4580,775 r180 top value={Value}
C90 "0.1uF" 0402NOM 2675,1120 r180 top value={Value}
C91 "0.1uF" 0402NOM 4285,785 r0 top value={Value}
C92 "2.2uF 10V" 0402NOM 4285,740 r0 top value={Value}
C93 "0.1uF" 0402NOM 4580,710 r180 top value={Value}
C94 "10pF" 0402NOM 2465,1060 r0 top value={Value}
C95 "10pF" 0402NOM 2555,1000 r90 top value={Value}
C96 "0.1uF" 0402NOM 2900,1340 r270 top value={Value}
C97 "2.2uF 10V" 0402NOM 4285,700 r0 top value={Value}
C98 "2.2uF 10V" 0402NOM 4285,660 r0 top value={Value}
C99 "10uF 6.3V" 0402NOM 4620,565 r180 top value={Value}
C100 "2.2uF 10V" 0402NOM 4560,650 r180 top value={Value}
C101 "10uF 6.3V" 0402NOM 4620,525 r180 top value={Value}
C102 "0.1uF" 0402NOM 4325,560 r90 top value={Value}
C103 "0.1uF" 0402NOM 4265,480 r180 top value={Value}
C104 ".01uF" 0402NOM 4345,440 r180 top value={Value}
C105 "0.1uF" 0402NOM 3125,1285 r270 top value={Value}
C106 "0.1uF" 0402NOM 2735,1370 r90 top value={Value}
C107 "0.1uF" 0402NOM 1660,295 r0 top value={Value}
C108 "0.1uF" 0402NOM 2130,1165 r180 top value={Value}
C109 "0.1uF" 0402NOM 2470,1300 r270 top value={Value}
C110 "2.2uF 10V" 0402NOM 2400,1240 r0 top value={Value}
D1 "LTST-C193KGKT-5A" 0603_POL 3895,60 r0 top value={Value}
D2 "B540" SMC1 2945,275 r0 top value={Value}
D3 "MURA120" SMAPWR 2025,705 r90 top value={Value}
D4 "MURA120" SMAPWR 1330,355 r90 top value={Value}
D5 "BAV74" SOT23-3 1785,160 r90 top
D6 "SMAJ58A" SMAPWR 1340,1040 r0 top value={Value}
D7 "BAT54SW" SC70 2685,150 r270 top
D8 "HD01-T" SMD4-MINIDIP 1325,1485 r0 top value={Value}
D9 "HD01-T" SMD4-MINIDIP 1325,1385 r270 top value={Value}
D10 "1N5819HW-7-F" SMAEIA 4300,75 r180 top value={Value}
D11 "LTST-C193KGKT-5A" 0603_POL 2555,890 r270 top value={Value}
D12 "MURA120" SMAPWR 4725,560 r90 top value={Value}
D13 "BAV74" SOT23-3 3625,2180 r270 top
D14 "CD143A-SR2.8" SOT143 2265,1210 r180 top value={Value}
D15 "CD143A-SR2.8" SOT143 2265,1460 r180 top value={Value}
D16 "BAT54SW" SC70 3005,1270 r90 top
D17 "BAT54SW" SC70 3005,1360 r90 top
J1 "10118192" USB_MICROB_AMPHENOL_10118192-0001LF 4830,455 r90 top value={Value}
J2 "SS-7188VS-A-FLS" CONNVERTICALRJ45_SS-7188VS-A-FLS-SHIELDED 1680,1635 r180 top value={Value}
J3 "1984992" TERMBLK1X5D3.5MMSPRING 2925,2060 r180 top
J4 "1933998" TERMBLK1X2X2D5MM_1933998 4830,1570 r90 top
K1 "CPC1002N" SOP4 3335,2110 r180 top
K2 "AZ932" AZ932FORMB 4090,2130 r270 top
L1 "10uH 0.85A" 1008 3050,1645 r270 top value={Value}
L2 "10uH 0.85A" 1008 3850,535 r270 top value={Value}
L3 "10uH 0.85A" 1008 4050,535 r270 top value={Value}
L4 "10uH 0.85A" 1008 3730,535 r270 top value={Value}
L5 "10uH 0.85A" 1008 3950,535 r270 top value={Value}
L6 "10uH 0.85A" 1008 1875,760 r180 top value={Value}
L8 "FERRITE 220 OHM" 0603LEAST 1485,1170 r270 top value={Value}
L9 "FERRITE 200 OHM" 0603LEAST 1305,1170 r270 top value={Value}
L10 "220uH 590ma" INDTAIYONRS6028 4245,280 r270 top value={Value}
L11 "BEAD" 0402NOM 4150,940 r270 top value={Value}
L12 "2.2uH" INDTAIYONR2410T 4505,935 r180 top value={Value}
L13 "2.2uH" INDTAIYONR2410T 4360,940 r180 top value={Value}
L14 "2.2uH" INDTAIYONR2410T 4525,545 r180 top value={Value}
L15 "BEAD" 0402NOM 2390,1300 r90 top value={Value}
P1 "JTAG ICE" HEADER2X5D50 2685,885 r0 top
P2 "HEADER1X2" HEADER1X2 1645,80 r180 top
Q1 "FDS2582" SOIC8 1910,380 r90 top value={Value}
Q2 "DZT2222A-13" SOT223 2500,1630 r90 top value={Value}
Q5 "MMBT2222AWT1G" SOT323 3495,2165 r90 top value={Value}
Q6 "NTR4003NT3G" SOT23-3 4140,555 r0 top value={Value}
R1 "120K" 0402NOM 3070,1490 r90 top value={Value}
R2 "120K" 0402NOM 3885,840 r270 top value={Value}
R3 "120K" 0402NOM 3925,840 r270 top value={Value}
R4 "49.9K" 0402NOM 4555,460 r180 top value={Value}
R5 "120K" 0402NOM 4015,840 r90 top value={Value}
R6 "30.9K" 0402NOM 4645,460 r0 top value={Value}
R7 "39" 0402NOM 3397,725 r90 bottom value={Value}
R8 "120K" 0402NOM 2715,820 r180 top value={Value}
R9 "120K" 0402NOM 3080,590 r270 top value={Value}
R10 "120K" 0402NOM 2630,895 r90 top value={Value}
R11 "1.27K15" 0402NOM 3080,1695 r180 top value={Value}
R12 "6.49K" 0402NOM 3585,665 r180 top value={Value}
R13 "1.27K 1%" 0402NOM 3100,1790 r270 top value={Value}
R14 "1K 1%" 0402NOM 3825,60 r0 top value={Value}
R15 "0" 0402NOM 3102,1375 r270 top value={Value}
R16 "49.9K 1%" 0402NOM 2880,1260 r180 top value={Value}
R17 "7.5K 1%" 0402NOM 2920,1220 r0 top value={Value}
R18 "20" 1206 3095,100 r0 top value={Value}
R19 "39K" 0603LEAST 2165,830 r90 top value={Value}
R20 "120K" 0402NOM 1525,335 r0 top value={Value}
R21 "10K" 0402NOM 1580,315 r270 top value={Value}
R22 "120K" 0402NOM 1445,370 r180 top value={Value}
R23 "49.9" 0402NOM 1850,200 r90 top value={Value}
R24 "162K" 0402NOM 1445,410 r180 top value={Value}
R25 "24.9K" 0402NOM 1445,490 r180 top value={Value}
R26 "10K 1%" 0402NOM 2730,60 r0 top value={Value}
R27 "49.9" 0402NOM 2060,285 r270 top value={Value}
R28 "30.9K 1%" 0402NOM 2525,60 r0 top value={Value}
R29 "3.83K" 0402NOM 2430,60 r180 top value={Value}
R30 "1K" 0402NOM 1830,420 r180 top value={Value}
R31 "0.39 OHMS" 1206 1960,170 r90 top value={Value}
R32 "1.27K" 0402NOM 1445,450 r180 top value={Value}
R33 "76.8" 0402NOM 1600,1320 r90 top value={Value}
R34 "76.8" 0402NOM 1535,1160 r90 top value={Value}
R35 "76.8" 0402NOM 1500,1650 r90 top value={Value}
R36 "76.8" 0402NOM 1530,1475 r0 top value={Value}
R37 "10K 1%" 0402NOM 2410,125 r270 top value={Value}
R38 "2.05K" 0402NOM 1810,360 r90 top value={Value}
R39 "301" 0402NOM 1725,315 r90 top value={Value}
R40 "3.57K 1%" 0402NOM 2605,60 r0 top value={Value}
R41 "0.33 OHMS" 0603LEAST 3755,175 r90 top value={Value}
R42 "120 2W" 2512 2600,1425 r180 top value={Value}
R43 "3.83K 1%" 0402NOM 4025,340 r180 top value={Value}
R44 "3K57 1%" 0402NOM 2825,1735 r0 top value={Value}
R45 "1K 1%" 0402NOM 2390,1035 r270 top value={Value}
R46 "1.27K 1%" 0402NOM 3880,340 r180 top value={Value}
R47 "7.5K 1%" 0402NOM 2745,1735 r180 top value={Value}
R48 "7.5K 1%" 0402NOM 3095,2040 r90 top value={Value}
R49 "3K57 1%" 0402NOM 3095,1955 r270 top value={Value}
R50 "1K" 0402NOM 2690,1255 r180 top value={Value}
R51 "1.27K 1%" 0402NOM 3175,2060 r180 top value={Value}
R52 "2.05K" 0402NOM 3990,680 r270 top value={Value}
R53 "2.05K" 0402NOM 3910,680 r270 top value={Value}
R54 "6.49K" 0402NOM 2690,1165 r0 top value={Value}
R55 "10K" 0402NOM 2690,1215 r0 top value={Value}
R57 "10K 1%" 0402NOM 2600,1330 r0 top value={Value}
R58 "6.49K" 0402NOM 2595,1000 r270 top value={Value}
R60 "49.9K 1%" 0402NOM 2820,1340 r90 top value={Value}
R61 "49.9K 1%" 0402NOM 2860,1340 r270 top value={Value}
R62 "1K" 0402NOM 2635,1020 r270 top value={Value}
R63 "2.05K 1%" 0402NOM 3440,2165 r180 top value={Value}
R64 "49.9K" 0402NOM 4185,480 r0 top value={Value}
R65 "1K" 0402NOM 4285,560 r270 top value={Value}
R66 "49.9K" 0402NOM 4285,620 r180 top value={Value}
R67 "10K" 0402NOM 4405,560 r270 top value={Value}
R68 "120K" 0402NOM 4445,560 r270 top value={Value}
R69 "10K" 0402NOM 4365,560 r270 top value={Value}
R70 "120K" 0402NOM 4345,480 r0 top value={Value}
R71 "10K 1%" 0402NOM 3120,565 r90 top value={Value}
R72 "49.9" 0402NOM 3160,565 r90 top value={Value}
R73 "49.9K 1%" 0402NOM 2775,1370 r270 top value={Value}
R74 "49.9K 1%" 0402NOM 2695,1370 r90 top value={Value}
R75 "3.3" 0402NOM 2130,1115 r180 top value={Value}
R76 "3.3" 0402NOM 2130,1215 r180 top value={Value}
R77 "3.3" 0402NOM 2130,1365 r180 top value={Value}
R78 "3.3" 0402NOM 2130,1465 r180 top value={Value}
R79 "0" 0402NOM 4445,435 r270 top value={Value}
R80 "39" 0402NOM 3470,705 r90 bottom value={Value}
R82 "120K" 0402NOM 2815,820 r0 top value={Value}
R83 "10K 1%" 0402NOM 2695,1460 r270 top value={Value}
T1 "POE13P-24L" XFMR_POE13P 2155,285 r0 top value={Value}
T2 "SM51108PEL" "XFMR WURTH 749013011" 2040,1115 r90 top value={Value}
TP1 "+3.3V" TESTPOINTTOPD25 4615,545 r90 bottom
TP2 "+1.0V" TESTPOINTTOPD25 4520,935 r90 bottom
TP3 "+1.8V" TESTPOINTTOPD25 4345,940 r90 bottom
TP4 "VREF" TESTPOINTTOPD25 3085,1730 r0 bottom
TP5 "+24V" TESTPOINTTOPD25 2925,2155 r90 bottom
TP6 "DAC SYNC" TESTPOINTTOPD25 2945,1390 r90 bottom
TP7 "SCLK" TESTPOINTTOPD25 2955,1455 r90 bottom
TP8 "SDO" TESTPOINTTOPD25 2945,1520 r90 bottom
TP9 "SENSOR" TESTPOINTTOPD25 2785,2155 r90 bottom
TP10 "0-10V" TESTPOINTTOPD25 2650,2155 r90 bottom
TP11 "GND" TESTPOINTTOPD25 4545,230 r90 bottom
TP12 "AC RELAY" TESTPOINTTOPD25 3000,1890 r90 bottom
TP13 "+5V" TESTPOINTTOPD25 4445,320 r90 bottom
TP14 "VIN" TESTPOINTTOPD25 1545,765 r90 bottom
TP15 "PGND" TESTPOINTTOPD25 1400,575 r90 bottom
TP16 "+3.3VA" TESTPOINTTOPD25 4285,720 r90 bottom
TP17 "MOUNTING" TESTPOINT250D130 1400,2100 r0 top
TP18 "MOUNTING" TESTPOINT250D130 1400,150 r0 top
TP19 "MOUNTING" TESTPOINT250D130 4850,150 r0 top
TP20 "MOUNTING" TESTPOINT250D130 4850,2100 r0 top
TP21 "SENSOR_L" TESTPOINTTOPD25 2510,2155 r90 bottom
U1 "AT91SAM9G35-CU" BGA217_17x17 3003.3,1209.6 r0 top
U2 "MT29F1G08ABAEAH4:E" VFBGA63 4080,930 r180 top
U3 "W9725G6KB-25" WBGA84 3252.3,2011.9 r0 top
U4 "TPS23753APW" TSSOP14 1745,375 r180 top
U5 "TCMT1107" SSOP4 2355,65 r180 top
U6 "TL431BIDCK" SC70-6 2580,125 r90 top
U7 "MC34063A" SOIC8N 4035,140 r180 top
U8 "LM2904M" SOIC8N 2735,1685 r0 top
U9 "DAC5311IDCKR" SC70-6 2840,1455 r270 top
U10 "KSZ8081RNx" QFN24 2460,1215 r0 top
U11 "ACT8865QI305" TQFN44-32 4435,735 r0 top
X1 "12 MHz" XTALABMM2 3335,540 r180 top value={Value}
X2 "25 MHz" XTALXRCGB 2485,1000 r0 top value={Value}

## Footprints (in the part's own frame and the unit in brackets; to place one, negate y for a bottom-side part, rotate by r counter-clockwise, add the part's x,y. Pads: shape width x height; smd on the part's side, far side on the other; paste and mask are expansions set on the pad)
0402NOM [mil]
  rect 24x24 smd: 1(-20,0) 2(20,0)
  silkscreen extent -5,-15 5,15
0603_POL [mil]
  rect 44x40 smd: 1(0,0) 2(68,0)
  silkscreen extent -59,-40 94,54
0603LEAST [mil]
  rect 36x32 smd: 1(35,0) 2(-35,0)
  silkscreen extent -60,-25 60,25
1008 [mil]
  rect 32x80 smd: 1(0,0) 2(80,0)
  silkscreen extent -25,-45 105,45
1206 [mil]
  rect 64x72 smd: 1(0,0) 2(112,0)
  silkscreen extent -44,-40 156,40
1210 [mil]
  rect 64x106 smd: 1(0,0) 2(112,0)
  silkscreen extent -44,-60 156,60
2512 [mil]
  rect 72x126 smd: 1(0,0) 2(220,0)
  silkscreen extent -55,-70 275,70
AZ932FORMB [mil]
  rect 100x100 hole 62: 1(0,0)
  round 80 hole 46: 2(80,235) 5(80,-235)
  round 100 hole 62: 4(560,235)
  silkscreen extent -115,-325 720,325
BGA217_17x17 [mm]
  round 0.4 smd mask+0.051: A1(0,0) A2(0.8,0) A3(1.6,0) A4(2.4,0) A5(3.2,0) A6(4,0) A7(4.8,0) A8(5.6,0) A9(6.4,0) A10(7.2,0) A11(8,0) A12(8.8,0) A13(9.6,0) A14(10.4,0) A15(11.2,0) A16(12,0) A17(12.8,0) B1(0,-0.8) B2(0.8,-0.8) B3(1.6,-0.8) B4(2.4,-0.8) B5(3.2,-0.8) B6(4,-0.8) B7(4.8,-0.8) B8(5.6,-0.8) B9(6.4,-0.8) B10(7.2,-0.8) B11(8,-0.8) B12(8.8,-0.8) B13(9.6,-0.8) B14(10.4,-0.8) B15(11.2,-0.8) B16(12,-0.8) B17(12.8,-0.8) C1(0,-1.6) C2(0.8,-1.6) C3(1.6,-1.6) C4(2.4,-1.6) C5(3.2,-1.6) C6(4,-1.6) C7(4.8,-1.6) C8(5.6,-1.6) C9(6.4,-1.6) C10(7.2,-1.6) C11(8,-1.6) C12(8.8,-1.6) C13(9.6,-1.6) C14(10.4,-1.6) C15(11.2,-1.6) C16(12,-1.6) C17(12.8,-1.6) D1(0,-2.4) D2(0.8,-2.4) D3(1.6,-2.4) D4(2.4,-2.4) D5(3.2,-2.4) D6(4,-2.4) D7(4.8,-2.4) D8(5.6,-2.4) D9(6.4,-2.4) D10(7.2,-2.4) D11(8,-2.4) D12(8.8,-2.4) D13(9.6,-2.4) D14(10.4,-2.4) D15(11.2,-2.4) D16(12,-2.4) D17(12.8,-2.4) E1(0,-3.2) E2(0.8,-3.2) E3(1.6,-3.2) E4(2.4,-3.2) E14(10.4,-3.2) E15(11.2,-3.2) E16(12,-3.2) E17(12.8,-3.2) F1(0,-4) F2(0.8,-4) F3(1.6,-4) F4(2.4,-4) F14(10.4,-4) F15(11.2,-4) F16(12,-4) F17(12.8,-4) G1(0,-4.8) G2(0.8,-4.8) G3(1.6,-4.8) G4(2.4,-4.8) G14(10.4,-4.8) G15(11.2,-4.8) G16(12,-4.8) G17(12.8,-4.8) H1(0,-5.6) H2(0.8,-5.6) H3(1.6,-5.6) H4(2.4,-5.6) H8(5.6,-5.6) H9(6.4,-5.6) H10(7.2,-5.6) H14(10.4,-5.6) H15(11.2,-5.6) H16(12,-5.6) H17(12.8,-5.6) J1(0,-6.4) J2(0.8,-6.4) J3(1.6,-6.4) J4(2.4,-6.4) J8(5.6,-6.4) J9(6.4,-6.4) J10(7.2,-6.4) J14(10.4,-6.4) J15(11.2,-6.4) J16(12,-6.4) J17(12.8,-6.4) K1(0,-7.2) K2(0.8,-7.2) K3(1.6,-7.2) K4(2.4,-7.2) K8(5.6,-7.2) K9(6.4,-7.2) K10(7.2,-7.2) K14(10.4,-7.2) K15(11.2,-7.2) K16(12,-7.2) K17(12.8,-7.2) L1(0,-8) L2(0.8,-8) L3(1.6,-8) L4(2.4,-8) L14(10.4,-8) L15(11.2,-8) L16(12,-8) L17(12.8,-8) M1(0,-8.8) M2(0.8,-8.8) M3(1.6,-8.8) M4(2.4,-8.8) M14(10.4,-8.8) M15(11.2,-8.8) M16(12,-8.8) M17(12.8,-8.8) N1(0,-9.6) N2(0.8,-9.6) N3(1.6,-9.6) N4(2.4,-9.6) N14(10.4,-9.6) N15(11.2,-9.6) N16(12,-9.6) N17(12.8,-9.6) P1(0,-10.4) P2(0.8,-10.4) P3(1.6,-10.4) P4(2.4,-10.4) P5(3.2,-10.4) P6(4,-10.4) P7(4.8,-10.4) P8(5.6,-10.4) P9(6.4,-10.4) P10(7.2,-10.4) P11(8,-10.4) P12(8.8,-10.4) P13(9.6,-10.4) P14(10.4,-10.4) P15(11.2,-10.4) P16(12,-10.4) P17(12.8,-10.4) R1(0,-11.2) R2(0.8,-11.2) R3(1.6,-11.2) R4(2.4,-11.2) R5(3.2,-11.2) R6(4,-11.2) R7(4.8,-11.2) R8(5.6,-11.2) R9(6.4,-11.2) R10(7.2,-11.2) R11(8,-11.2) R12(8.8,-11.2) R13(9.6,-11.2) R14(10.4,-11.2) R15(11.2,-11.2) R16(12,-11.2) R17(12.8,-11.2) T1(0,-12) T2(0.8,-12) T3(1.6,-12) T4(2.4,-12) T5(3.2,-12) T6(4,-12) T7(4.8,-12) T8(5.6,-12) T9(6.4,-12) T10(7.2,-12) T11(8,-12) T12(8.8,-12) T13(9.6,-12) T14(10.4,-12) T15(11.2,-12) T16(12,-12) T17(12.8,-12) U1(0,-12.8) U2(0.8,-12.8) U3(1.6,-12.8) U4(2.4,-12.8) U5(3.2,-12.8) U6(4,-12.8) U7(4.8,-12.8) U8(5.6,-12.8) U9(6.4,-12.8) U10(7.2,-12.8) U11(8,-12.8) U12(8.8,-12.8) U13(9.6,-12.8) U14(10.4,-12.8) U15(11.2,-12.8) U16(12,-12.8) U17(12.8,-12.8)
  silkscreen extent -0.8,-13.6 13.6,0.8
CAP_AL_SMD_8.3MM [mil]
  rect 140x50 smd: 1(-120,0) 2(120,0)
  silkscreen extent -165,-165 165,165
CAP_AL_SMD_10.3MM [mil]
  rect 160x60 smd: 1(-160,0) 2(160,0)
  silkscreen extent -205,-205 205,205
CONNVERTICALRJ45_SS-7188VS-A-FLS-SHIELDED [mil]
  rect 70x70 hole 35: 1(-350,-100)
  round 70 hole 35: 2(-300,0) 3(-250,-100) 4(-200,0) 5(-150,-100) 6(-100,0) 7(-50,-100) 8(0,0)
  round 128 hole 128: 9(50,-350) 10(-400,-350)
  round 80 hole 65: 11(135,-197) 12(-485,-197)
  silkscreen extent -485,-610 135,50
HEADER1X2 [mil]
  rect 70x70 hole 39: 1(0,0)
  round 70 hole 39: 2(-100,0)
HEADER2X5D50 [mil]
  rect 33x33 hole 22 mask+2: 1(0,0)
  round 33 hole 22 mask+2: 2(0,50) 3(50,0) 4(50,50) 5(100,0) 6(100,50) 7(150,0) 8(150,50) 9(200,0) 10(200,50)
  silkscreen extent -25,-40 225,90
INDTAIYONR2410T [mil]
  rect 28x80 smd: 1(-29,0) 2(29,0)
  silkscreen extent -55,-50 55,50
INDTAIYONRS6028 [mil]
  rect 63x225 smd: 1(-92.5,0) 2(92.5,0)
  silkscreen extent -135,-120 135,120
QFN24 [mil]
  rect 19x9 smd mask+3: 1(0,0) 2(0,-19.7) 3(0,-39.4) 4(0,-59.1) 5(0,-78.8) 6(0,-98.5) 13(146,-98.5) 14(146,-78.8) 15(146,-59.1) 16(146,-39.4) 17(146,-19.7) 18(146,0)
  rect 9x19 smd mask+3: 7(23.75,-122.25) 8(43.45,-122.25) 9(63.15,-122.25) 10(82.85,-122.25) 11(102.55,-122.25) 12(122.25,-122.25) 19(122.25,23.75) 20(102.55,23.75) 21(82.85,23.75) 22(63.15,23.75) 23(43.45,23.75) 24(23.75,23.75)
  rect 102x102 smd: 25(73,-49.25)
  silkscreen extent 0,-125 145,25
SC70 [mil]
  rect 24x24 smd: 1(0,0) 2(50,0) 3(25,65)
SC70-6 [mil]
  rect 16x35 smd: 1(25,45) 2(0,45) 3(-25,45) 4(-25,-45) 5(0,-45) 6(25,-45)
  silkscreen extent 40,45 60,65
SMAEIA [mil]
  rect 56x72 smd: 1(0,0) 2(105,0)
  silkscreen extent -64,-58 175,58
SMAPWR [mil]
  rect 79x79 smd: 1(0,0) 2(157,0)
  silkscreen extent -15,-60 170,60
SMC1 [mil]
  rect 110x150 smd: 1(0,0) 2(280,0)
  silkscreen extent 0,-120 270,120
SMD4-MINIDIP [mil]
  rect 65x71 smd: 1(0,0) 2(100,0) 3(100,195) 4(0,195)
  silkscreen extent -65,-35 -40,-10
SOIC8 [mil]
  rect 86x24 smd: 1(0,0) 2(0,-50) 3(0,-100) 4(0,-150) 5(210,-150) 6(210,-100) 7(210,-50) 8(210,0)
  silkscreen extent -74,-175 160,32
SOIC8N [mil]
  rect 62x24 smd: 1(0,0) 2(0,-50) 3(0,-100) 4(0,-150) 5(210,-150) 6(210,-100) 7(210,-50) 8(210,0)
  silkscreen extent -68,-170 160,20
SOP4 [mil]
  rect 86x24 smd: 1(0,0) 2(0,-100) 3(210,-100) 4(210,0)
  silkscreen extent -48,-120 160,45
SOT23-3 [mil]
  rect 40x55 smd: 1(0,0) 2(80,0) 3(40,87)
SOT143 [mil]
  rect 55x55 smd: 1(0,0)
  rect 39x55 smd: 2(68,0) 3(68,87) 4(-8,87)
SOT223 [mil]
  rect 48x88 smd: 1(-90,-124) 2(0,-124) 3(90,-124)
  rect 142x88 smd: 4(0,120)
  silkscreen extent -125,-69 125,69
SOT323 [mil]
  rect 24x24 smd: 1(0,0) 2(-50,0) 3(-25,-75)
SSOP4 [mil]
  rect 52x35 smd: 1(0,0) 2(0,-50) 3(250,-50) 4(250,0)
  silkscreen extent -15,-80 215,48
TERMBLK1X2X2D5MM_1933998 [mil]
  rect 100x100 hole 50: 1(0,0) 3(0,197)
  round 100 hole 50: 2(197,0) 4(197,197)
  silkscreen extent -120,-160 315,400
TERMBLK1X5D3.5MMSPRING [mil]
  rect 100x100 hole 60: 1(0,0)
  round 100 hole 60: 2(138,0) 3(276,0) 4(414,0) 5(552,0)
  silkscreen extent -130,-185 630,290
TESTPOINT250D130 [mil]
  round 250 hole 130: 1(0,0)
TESTPOINTTOPD25 [mil]
  round 50 smd: 1(0,0)
TQFN44-32 [mil]
  oval 30x10 smd mask+2: 1(-79,56) 2(-79,40) 3(-79,24) 4(-79,8) 5(-79,-8) 6(-79,-24) 7(-79,-40) 8(-79,-56) 17(79,-56) 18(79,-40) 19(79,-24) 20(79,-8) 21(79,8) 22(79,24) 23(79,40) 24(79,56)
  oval 10x30 smd mask+2: 9(-56,-79) 10(-40,-79) 11(-24,-79) 12(-8,-79) 13(8,-79) 14(24,-79) 15(40,-79) 16(56,-79) 25(56,79) 26(40,79) 27(24,79) 28(8,79) 29(-8,79) 30(-24,79) 31(-40,79) 32(-56,79)
  rect 110x110 smd: 33(0,0)
  silkscreen extent -107,-80 80,80
TSSOP14 [mil]
  rrect50% 63x16 smd: 1(0,0) 2(0,-25.6) 3(0,-51.2) 4(0,-76.8) 5(0,-102.4) 6(0,-128) 7(0,-153.6) 8(220,-153.6) 9(220,-128) 10(220,-102.4) 11(220,-76.8) 12(220,-51.2) 13(220,-25.6) 14(220,0)
  silkscreen extent 40,-165 180,41
USB_MICROB_AMPHENOL_10118192-0001LF [mil]
  rect 16x53 smd: 1(0,0) 2(25.6,0) 3(51.2,0) 4(76.8,0) 5(102.4,0)
  rect 82x63 smd: 6(173,-5) 11(-71,-5)
  rect 71x75 smd: 7(199,-105) 8(96,-105) 9(6,-105) 10(-97,-105)
  silkscreen extent -100,-170 200,61
VFBGA63 [mm]
  round 0.4 smd mask+0.051: A1(0,0) A2(0.8,0) A9(6.4,0) A10(7.2,0) B1(0,-0.8) B9(6.4,-0.8) B10(7.2,-0.8) C3(1.6,-1.6) C4(2.4,-1.6) C5(3.2,-1.6) C6(4,-1.6) C7(4.8,-1.6) C8(5.6,-1.6) D3(1.6,-2.4) D4(2.4,-2.4) D5(3.2,-2.4) D6(4,-2.4) D7(4.8,-2.4) D8(5.6,-2.4) E3(1.6,-3.2) E4(2.4,-3.2) E5(3.2,-3.2) E6(4,-3.2) E7(4.8,-3.2) E8(5.6,-3.2) F3(1.6,-4) F4(2.4,-4) F5(3.2,-4) F6(4,-4) F7(4.8,-4) F8(5.6,-4) G3(1.6,-4.8) G4(2.4,-4.8) G5(3.2,-4.8) G6(4,-4.8) G7(4.8,-4.8) G8(5.6,-4.8) H3(1.6,-5.6) H4(2.4,-5.6) H5(3.2,-5.6) H6(4,-5.6) H7(4.8,-5.6) H8(5.6,-5.6) J3(1.6,-6.4) J4(2.4,-6.4) J5(3.2,-6.4) J6(4,-6.4) J7(4.8,-6.4) J8(5.6,-6.4) K3(1.6,-7.2) K4(2.4,-7.2) K5(3.2,-7.2) K6(4,-7.2) K7(4.8,-7.2) K8(5.6,-7.2) L1(0,-8) L2(0.8,-8) L9(6.4,-8) L10(7.2,-8) M1(0,-8.8) M2(0.8,-8.8) M9(6.4,-8.8) M10(7.2,-8.8)
  silkscreen extent -0.8,-9.91 8,1.14
WBGA84 [mm]
  round 0.4 smd mask+0.051: A1(0,0) A2(0.8,0) A3(1.6,0) A7(4.8,0) A8(5.6,0) A9(6.4,0) B1(0,-0.8) B2(0.8,-0.8) B3(1.6,-0.8) B7(4.8,-0.8) B8(5.6,-0.8) B9(6.4,-0.8) C1(0,-1.6) C2(0.8,-1.6) C3(1.6,-1.6) C7(4.8,-1.6) C8(5.6,-1.6) C9(6.4,-1.6) D1(0,-2.4) D2(0.8,-2.4) D3(1.6,-2.4) D7(4.8,-2.4) D8(5.6,-2.4) D9(6.4,-2.4) E1(0,-3.2) E2(0.8,-3.2) E3(1.6,-3.2) E7(4.8,-3.2) E8(5.6,-3.2) E9(6.4,-3.2) F1(0,-4) F2(0.8,-4) F3(1.6,-4) F7(4.8,-4) F8(5.6,-4) F9(6.4,-4) G1(0,-4.8) G2(0.8,-4.8) G3(1.6,-4.8) G7(4.8,-4.8) G8(5.6,-4.8) G9(6.4,-4.8) H1(0,-5.6) H2(0.8,-5.6) H3(1.6,-5.6) H7(4.8,-5.6) H8(5.6,-5.6) H9(6.4,-5.6) J1(0,-6.4) J2(0.8,-6.4) J3(1.6,-6.4) J7(4.8,-6.4) J8(5.6,-6.4) J9(6.4,-6.4) K2(0.8,-7.2) K3(1.6,-7.2) K7(4.8,-7.2) K8(5.6,-7.2) K9(6.4,-7.2) L1(0,-8) L2(0.8,-8) L3(1.6,-8) L7(4.8,-8) L8(5.6,-8) M2(0.8,-8.8) M3(1.6,-8.8) M7(4.8,-8.8) M8(5.6,-8.8) M9(6.4,-8.8) N1(0,-9.6) N2(0.8,-9.6) N3(1.6,-9.6) N7(4.8,-9.6) N8(5.6,-9.6) P2(0.8,-10.4) P3(1.6,-10.4) P7(4.8,-10.4) P8(5.6,-10.4) P9(6.4,-10.4) R1(0,-11.2) R2(0.8,-11.2) R3(1.6,-11.2) R7(4.8,-11.2) R8(5.6,-11.2)
  silkscreen extent -0.76,-11.94 7.24,0.63
"XFMR WURTH 749013011" [mil]
  rect 25x75 smd: 1(0,0) 2(50,0) 3(100,0) 4(150,0) 5(200,0) 6(250,0) 7(300,0) 8(350,0) 9(350,350) 10(300,350) 11(250,350) 12(200,350) 13(150,350) 14(100,350) 15(50,350) 16(0,350)
  silkscreen extent -80,-45 430,315
XFMR_POE13P [mil]
  rect 80x50 smd: 1(0,0) 2(0,98) 3(0,196) 4(0,294) 5(0,392) 6(670,392) 7(670,294) 8(670,196) 9(670,98) 10(670,0)
  silkscreen extent -15,-85 595,460
XTALABMM2 [mil]
  rect 71x55 smd: 1(-87,-47) 2(87,-47) 3(87,47) 4(-87,47)
  silkscreen extent -40,-75 40,75
XTALXRCGB [mil]
  rrect50% 32x26 smd mask+2: 1(-25.6,-17.7) 2(25.6,-17.7) 3(25.6,17.7) 4(-25.6,17.7)
  silkscreen extent -5,-35 5,35

## Part data
C1 C2 C3 C4 C5 C6 C7 C8 C9 C10 C11 C12 C13 C14 C15 C16 C17 C18 C19 C20 C21 C22 C23 C24 C25 C26 C27 C28 C29 C30 C31 C32 C33 C34 C35 C36 C37 C38 C39 C41 C42 C43 C44 C45 C47 C48 C51 C55 C58 C60 C61 C62 C63 C64 C67 C69 C70 C71 C74 C76 C77 C78 C79 C80 C81 C82 C83 C84 C85 C86 C87 C88 C89 C90 C91 C92 C93 C94 C95 C96 C97 C98 C99 C100 C101 C102 C103 C104 C105 C106 C107 C108 C109 C110: library part CCAP0402, Part Number=CCAP0402
C40 C49: library part CCAP1210, Part Number=CCAP1210
C46 C50 C65 C68 C72: library part CCAP0603L, Part Number=CCAP0603L
C52 C53 C54 C57 C59 C73: library part CCAP1206, Part Number=CCAP1206
C56 C75: library part CAP_AL_SMD_8.3MM, Part Number=CAP_AL_SMD_8.3MM
C66: library part CAP_AL_SMD_10.3MM, Part Number=CAP_AL_SMD_10.3MM
D1 D11: library part LED_0603_C1A2, Part Number=LED_0603_C1A2
D2: library part DIODESMC1, Part Number=DIODESMC1
D3 D4 D12: library part DIODESMAPWR, Part Number=DIODESMAPWR
D5 D13: library part BBAV74ZX, Part Number=BBAV74ZX
D6: library part ZZENERSMAPWR, Part Number=ZZENERSMAPWR
D7 D16 D17: library part BBAT54SC70, Part Number=BBAT54SC70
D10: library part DIODESMAEIA, Part Number=DIODESMAEIA
J1: library part USB_MICROB_AMPHENOL_10118192-0001LF, Part Number=USB_MICROB_AMPHENOL_10118192-0001LF
J2: library part CONNVERTICALRJ45_SS-7188VS-A-FLS-SHIELDED, Part Number=CONNVERTICALRJ45_SS-7188VS-A-FLS-SHIELDED
J3: library part TERMBLK1X5D3.5MMSPRING, Part Number=TERMBLK1X5D3.5MMSPRING
J4: library part TERMBLK1X2X2D5MM_1933998, Part Number=TERMBLK1X2X2D5MM_1933998
K2: library part AZ932FORMB, Part Number=AZ932FORMB
L1 L2 L3 L4 L5 L6: library part IND1008, Part Number=IND1008
L8 L9: library part FERRITE0603L, Part Number=FERRITE0603L
L10: library part INDTAIYONRS6028, Part Number=INDTAIYONRS6028
L11 L15: library part FERRITE0402, Part Number=FERRITE0402
L12 L13 L14: library part INDTAIYONR2410T, Part Number=INDTAIYONR2410T
P1: library part HEADER2X5D50, Part Number=HEADER2X5D50
Q1: library part SI4386DY, Part Number=SI4386DY
Q2: library part FZT2222A, Part Number=FZT2222A
Q5: library part NPNSOT323, Part Number=NPNSOT323
Q6: library part FETNSOT23, Part Number=FETNSOT23
R1 R2 R3 R4 R5 R6 R7 R8 R9 R10 R11 R12 R13 R14 R15 R16 R17 R20 R21 R22 R23 R24 R25 R26 R27 R28 R29 R30 R32 R33 R34 R35 R36 R37 R38 R39 R40 R43 R44 R45 R46 R47 R48 R49 R50 R51 R52 R53 R54 R55 R57 R58 R60 R61 R62 R63 R64 R65 R66 R67 R68 R69 R70 R71 R72 R73 R74 R75 R76 R77 R78 R79 R80 R82 R83: library part RRES0402, Part Number=RRES0402
R18 R31: library part RRES1206, Part Number=RRES1206
R19 R41: library part RRES0603L, Part Number=RRES0603L
R42: library part RRES2512, Part Number=RRES2512
T1: library part XFMR_POE13P, Part Number=XFMR_POE13P
T2: library part "XFMR WURTH 749013011", Part Number="XFMR WURTH 749013011"
TP1 TP2 TP3 TP4 TP5 TP6 TP7 TP8 TP9 TP10 TP11 TP12 TP13 TP14 TP15 TP16 TP21: library part TESTPOINTTOPD25, Part Number=TESTPOINTTOPD25
TP17 TP18 TP19 TP20: library part TESTPOINT250D130, Part Number=TESTPOINT250D130
U7: library part MC3x063A, Part Number=MC3x063A
U8: library part LM2904M_N, "Low Power Dual OPERATIONAL AMPLIFIER", Part Number=LM2904M_N
U9: library part DACx311IDCKR, Part Number=DACx311IDCKR
U10: library part KXA8081RNx, Part Number=KXA8081RNx
U11: library part ACT8865QIx05, Part Number=ACT8865QIx05
X1: library part XTALABMM2, Part Number=XTALABMM2
X2: library part XTALXRCGB, Part Number=XTALXRCGB
D8 D9: Part Number=HD01-T
D14 D15: Part Number=CD143A-SR2.8
K1: Part Number=CPC1002N
P2: Part Number=HEADER1X2
U1: Code_JEDEC=MO-205, ComponentLink1Description="Manufacturer URL", ComponentLink1URL=http://www.atmel.com/, ComponentLink2Description="SAM9G35 Datasheet", ComponentLink2URL=http://www.atmel.com/dyn/resources/prod_documents/doc11053.pdf, ComponentLink3Description="SAM9G35 Summary", ComponentLink3URL=http://www.atmel.com/dyn/resources/prod_documents/11053s.pdf, DatasheetVersion="revB, Sep-2011", PackageDescription="217-Ball Plastic Low Profile Fine-Pitch BGA, 15 x 15 mm Body, 0.8 mm Pitch", PackageReference=LFBGA217, PackageVersion=2011, Part Number=AT91SAM9G35-CU
U2: Part Number=MT29F1G08ABAEAH4:E
U3: Part Number=W9725G6KB-25
U4: Part Number=TPS23753APW
U5: Part Number=TCMT1107
U6: Part Number=TL431BIDCK

## Via types
v1: diameter 25, hole 12, TopLayer to BottomLayer, 212 vias
v2: diameter 18, hole 8, TopLayer to BottomLayer, tented top, 187 vias
v3: diameter 18, hole 8, TopLayer to BottomLayer, 171 vias
v4: diameter 18, hole 8, TopLayer to BottomLayer, tented both sides, 7 vias
v5: diameter 25, hole 12, TopLayer to BottomLayer, tented top, 2 vias

## Nets (pads, with @x,y where several pads share a name; then routed paths per layer and width w, separated by ;. In a path a pad name is that pad's centre, name@x,y a point inside that pad or via, vN(x,y) a via of type N, cw(c..) or ccw(c..) an arc to the next point about the centre after c; other vN are vias at no path point)
"0 - 10V FDBK": R48.1 R49.1 U1.C4 | length 1023.8
  TopLayer w5.5: U1.C4@3097.79,1146.61 v2(3110.4,1159.2)
  TopLayer w10: R49.1@3095,1974 R49.1@3095,1975 v3(3095,1998) R48.1@3095,2020 R48.1@3095,2023
  BottomLayer w7: v3(3095,1998) 3054,1957 3054,1857 2960,1763 2960,1645 3002,1603 3002,1527 3048,1481 3048,1235 3110.4,1172.6 v2(3110.4,1159.2)
"0 - 10V OUT": J3.3 K1.3 TP10.1 | length 642.9
  TopLayer w20: J3.3@2651,2058 2650,2059 2650,2134 2682,2166 2962,2166 3006,2210 K1.3@3090,2210
  BottomLayer w10: J3.3@2650,2060 TP10.1@2650,2155
0-10V_RELAY_ON: R51.2 U1.B4 | length 997.5
  TopLayer w5.5: v3(3067,1374) 3067,1347 3053,1333 3053,1244 3062.7,1234.3 3068,1234.3 3082.1,1220.2 3082.1,1193.79 U1.B4@3097.79,1178.1
  TopLayer w7: v3@3133,2060 v3(3134,2060) R51.2@3155,2060
  BottomLayer w7: v3@3068,1375 3068,1432 3093,1457 3093,1577 3045,1625 3045,1813 3113,1881 3113,2039 v3(3134,2060)
+1.0V: C44.2 C45.2 C81.2 C84.2 C88.2 L3.2 L5.2 L12.1 TP2.1 U1.H14 U1.K8 U1.K9 U11.24 | length 567.4
  TopLayer w10: v2@3223.77,906.97 U1.K8@3223.77,926.14 ; v2@3255.27,904.67 U1.K9@3255.27,926.14 ; v2@3392.17,989.13 U1.H14@3412.75,989.13 ; U11.24@4522,792 v3(4522,806)
  TopLayer w15: v3(4558,915) v3(4558,935) v3(4558,955)
  TopLayer w20: v1(3930,425) 3930,446 3925,451 3929,455 L5.2@3950,455 L5.2@3960,455 ; v1(3970,425) L5.2@3970,450 ; v1(4030,425) 4030,455 L3.2@4050,455 4069.9,455 4070.1,454.8 4070,454.7 v1(4070,425) ; v3(4522,806) v3(4522,826) ; 4523,815 C88.2@4545,815 ; L12.1@4534,955 v3(4558,955) C81.2@4580,955 ; L12.1@4535,915 v3(4558,915) C84.2@4580,915
  BottomLayer w10: v2(3223.7,907.1) 3223.7,887.8 3231,880.5 C44.2@3242.3,880.5 ; C44.2@3251.7,880.1 3251.7,896.9 3255.2,900.4 v2(3255.2,907.1) ; C45.2@3370.7,989.1 v2(3391.8,989.1)
  BottomLayer w15: TP2.1@4520,935 v3(4558,935) v3@4559,935
+1.8V: C4.2 C5.2 C6.2 C7.2 C8.2 C9.2 C11.2 C13.2 C16.2 C17.2 C20.2 C23.2 C24.2 C27.2 C29.2 C32.2 C33.2 C38.2 C39.2 C83.2 C87.2 C91.2 L1.2 L13.2 R1.2 TP3.1 U1.D10 U1.D13 U1.F14 U3.A1 U3.A9 U3.C1 U3.C3 U3.C7 U3.C9 U3.E1 U3.E9 U3.G1 U3.G3 U3.G7 U3.G9 U3.J1 U3.J9 U3.M9 U3.R1 U11.1 | length 1533.9
  TopLayer w10: R1.2@3070,1520 L1.2@3070,1564 ; C11.2@3192,1789 3197,1789 3221,1765 v2(3232,1765) 3247.23,1765 U3.J1@3252.3,1759.93 ; C4.2@3195,1573.6 3197.65,1570.95 U3.R1@3252.3,1570.95 ; C7.2@3195,1885 3231.17,1885 3232.08,1885.92 U3.E1@3252.3,1885.92 ; C5.2@3196,1828.03 3231.5,1827.96 3246.95,1828.01 U3.G1@3252.18,1822.81 ; U3.C1@3252.3,1948.91 3226.91,1948.91 3218,1940 C8.2@3195,1940 C9.2@3195,2020 3223,2020 v2(3231,2012) 3231.1,2011.9 U3.A1@3252.3,2011.9 ; v2@3286.76,1093.84 U1.D10@3286.76,1115.11 ; U3.G3@3315.29,1822.92 v2@3335.92,1822.92 ; U3.C3@3315.29,1948.91 v2@3335.91,1948.91 ; U1.D13@3381.25,1115.11 3381.25,1113.35 v2@3392.6,1102 ; v2@3397.62,1052.12 U1.F14@3412.75,1052.12 ; v2@3420,1952 3423.09,1948.91 U3.C7@3441.28,1948.91 ; v2@3420.08,1822.92 U3.G7@3441.28,1822.92 ; U3.M9@3504.27,1665.44 3510.71,1659 3525,1659 3526,1660 3542,1660 3546,1664 C20.2@3565,1664 ; U3.J9@3504.27,1759.93 3538.07,1759.93 3548,1750 C24.2@3565,1750 ; U3.G9@3504.27,1822.92 3505.92,1822.92 3510,1827 3525,1827 3527,1829 C27.2@3565,1829 ; U3.E9@3504.27,1885.92 C29.2@3564.08,1885.92 ; U3.C9@3504.27,1948.91 C32.2@3562.91,1948.91 ; U3.A9@3504.27,2011.9 C33.2@3563.9,2011.9 ; C24.2@3565,1749 C16.2@3565,1790 C27.2@3565,1830 ; v2(4326,775) 4316,775 4307,784 4306,783 4306,785 4306.5,784.5 4317,795 v2(4326,795) 4335,795 4339,791 U11.1@4356,791
  TopLayer w15: v3@4306,919 v3(4306,920) v3(4306,940) v3(4306,960)
  TopLayer w20: C17.2@3030,1520 L1.2@3030,1566 ; C87.2@4285,920 v3(4306,920) L13.2@4329,920 ; C83.2@4285,960 v3(4306,960) L13.2@4330,960
  BottomLayer w10: C39.2@3287,1072 v2(3287,1092) v2@3287,1094.3 ; v2(3334,1949) 3359,1949 3365,1955 C13.2@3365,1970 ; v2(3392.2,1046) v2@3392.2,1098.9 ; C23.2@3410,1975 3410,1962 v2@3421,1951
  BottomLayer w15: v3(4306,940) TP3.1@4345,940
  other v1: 3030,1535 3070,1535
  other v2: 3392.2,1099.5 3231.7,1571.1 3524.9,1659.7 3525,1760 3334,1823 3422,1823 3525.3,1826.8 3231.5,1827.9 3231.5,1886.1 3525.5,1886.1 3231.5,1949.1 3525.5,1949.1 3420.5,1952.1 3526,2012
+3.3V: C47.2 C48.2 C90.2 C93.2 C99.2 C101.2 D1.2 D11.2 D14.4 D15.4 D16.2 D17.2 L2.2 L4.2 L11.2 L14.1 P1.1 R8.2 R9.2 R10.1 R15.1 R50.1 R52.1 R53.1 R60.2 R62.2 R67.2 R68.2 R69.2 R71.1 R73.2 R82.2 TP1.1 U1.H4 U1.P7 U10.14 U11.19 | length 1920.3
  TopLayer w7: U10.14@2606,1136.2 2606.2,1136 v3(2631,1136) ; v1(2860,820) v1@2863.9,820
  TopLayer w10: D15.4@2268,1388 2270,1390 v1(2305,1390) ; D14.4@2275,1125 v1(2305,1125) ; v3(2555,790) D11.2@2555,822 D11.2@2555,825 ; v1(2630,850) 2630,864 R10.1@2631,865 ; v3(2631,1136) 2631,1127 2638,1120 C90.2@2655,1120 ; v3@2635,980 R62.2@2635,1000 ; v1@2668,820 v1(2670,820) R8.2@2695,820 R8.2@2696,820 ; R50.1@2710,1255 v3(2731,1255) v3@2732,1255 ; v3(2775,1329) R73.2@2775,1350 ; R60.2@2820,1360 v3@2820,1379 ; R82.2@2836,820 v1(2860,820) ; v3@2985,1320 D16.2@3005,1320 ; D17.2@3005,1410 v3(3005,1431) ; v3(3080,548) R9.2@3080,570 ; U1.H4@3097.79,989.13 v2@3115.57,989.13 ; R15.1@3102,1395 v3(3102,1417) ; v3(3120,523) R71.1@3120,545 ; U1.P7@3192.28,800.15 v2@3192.28,819.32 ; L2.2@3830,455 L2.2@3850,455 ; v3(3910,725) 3910,722.4 v3@3910.7,721.7 ; R53.1@3910.7,699.7 v3@3910.7,721.7 ; v3@3910.7,722.1 v3@3910.7,721.7 ; D1.2@3963,60 v1(4000,60) ; R52.1@3989.4,699.4 v3@3989.4,725 ; v3@4365,518 R69.2@4365,540 ; v3(4405,517) R67.2@4405,540 ; v3(4445,517) R68.2@4445,540 ; U11.19@4514,711 v3(4538,711) C93.2@4558,711 ; v3@4560,688 C93.2@4560,710
  TopLayer w15: v1@4150,891.2 L11.2@4150,920 ; v3(4578,525) v3(4578,545) v3(4578,565)
  TopLayer w20: v1(3710,425) 3710,455 L4.2@3730,455 L4.2@3750,455 ; v1(3750,425) L4.2@3750,455 ; v1@3830,430.8 3830,455 3795,455 ; v1(3870,425) L2.2@3870,450 ; v1(4149.9,893.8) 4149.9,806.9 4068,725 v3(3990,725) 3989.4,725 v3(3910,725) 3810,725 3790,705 3790,460 3795,455 ; L14.1@4554,525 v3(4578,525) C101.2@4600,525 ; L14.1@4556,565 v3(4578,565) C99.2@4600,565 ; L4.2@3750,455 3795,455
  BottomLayer w10: v2(3116.4,989) C47.2@3141,989 ; v2@3192,819.1 C48.2@3192,845
  BottomLayer w15: v3(4578,545) TP1.1@4615,545
  other v1: 3830,425
  other v2: 3192.3,818.9
  other v3: 4365,517 4560,689 2635,979 2984,1320 2820,1381
+3.3VA: C14.2 C43.2 C77.2 C92.2 L15.2 TP16.1 U1.A4 U1.C6 U9.4 U11.4 | length 2944.8
  TopLayer w10: L15.2@2391,1315 v2@2391,1335 ; C77.2@2747,1480 v3(2767,1480) U9.4@2795,1480 ; C14.2@3080,1264 3080,1245 3094.9,1230.1 v2(3097.7,1230.1) ; U1.A4@3097.7,1209.69 v2@3097.7,1227.4 ; U1.C6@3160.78,1146.98 v2@3173.3,1159.5 ; C92.2@4307,740 4323,740 4326,743 v3(4332,743) U11.4@4356,743
  Mid Layer 2 w10: v2(2983,1295) 3033,1295 v2@3098,1230
  BottomLayer w10: v2@2390,1341 2412,1363 2497,1363 2566,1294 2739,1294 2793,1240 2858,1240 2880,1262 2880,1295 ; v3(2767,1480) 2852,1480 2880,1452 2880,1295 ; v2(2983,1295) 2880,1295 ; v2@3095,1230 3097,1230 3122,1205 3129,1205 3174,1160 3246,1160 3312,1094 3312,1043 3340,1015 3408,1015 3477,946 3781,946 3871,1036 3987,1036 4080,943 4080,869 4229,720 TP16.1@4285,720 4310.01,745 4331.94,745 v3@4332,745 ; C43.2@3173.3,1141.7 v2(3173.3,1160.1) ; TP16.1@4285,715 TP16.1@4286.4,719.57
  other v2: 2390.6,1340.6
+3.3VNF: C1.2 C2.2 C3.2 C41.2 C42.2 L11.1 R2.2 R3.2 U1.J14 U1.K14 U2.D3 U2.G4 U2.H8 U2.J6 | length 335.7
  TopLayer w10: v2@3391.84,926.14 U1.K14@3412.75,926.14 ; v2@3392.97,957.63 U1.J14@3412.75,957.63 ; v2@3840.5,1145.1 3845.87,1150.47 U2.H8@3859.53,1150.47 ; v3@3885,798.8 v3(3885,799) R2.2@3885,820 ; U2.J6@3922.52,1181.97 v2@3934.85,1194.3 ; v3@3925,797.5 v3(3925,799) R3.2@3925,820 ; U2.G4@3985.51,1118.98 v2@3999.2,1105.29 ; U2.D3@4017.01,1024.49 v2@4036.79,1024.49
  TopLayer w15: L11.1@4150,960 v1@4150,987.2
  BottomLayer w10: C41.2@3370,942 3391.9,942 ; v2@3391.9,925.5 3391.9,942 ; v2(3391.9,957.6) 3391.9,942 ; 3392.3,942 3391.9,942 ; C1.2@3818,1145 v2@3840.4,1145 ; v2@3936,1195.8 C42.2@3936,1218 ; v2@3998.5,1105 C3.2@4023,1105 ; v2@4039.2,1025 C2.2@4062,1025
  other v1: 4149.9,986.1
  other v2: 3391.8,926.2 4037.8,1024.5 3999,1105.2 3840.5,1144.9 3935.9,1194.7
+5V: C79.1 C80.2 C89.2 C97.2 C98.2 C100.2 D12.2 R64.1 R79.1 U11.5 U11.6 U11.16 U11.20 U11.23 U11.26 U11.31 | length 877.6
  TopLayer w5.5: U11.20@4514,727 4532,727 4537,732 4629,732 4643,718 v3(4654,718)
  TopLayer w10: v3@4143.9,480 R64.1@4165,480 ; C98.2@4305,660 4323,660 4331,668 v2@4331,719 ; C97.2@4305,700 4329,700 ; v2(4333,719) 4355,719 ; U11.6@4355,711 4355,719 ; U11.5@4356,727 4355,726 4355,719 ; C79.1@4377,865 4390,865 4395,860 U11.31@4395,814 ; U11.26@4475,814 4475,840 v3(4479,844) 4479,845 4487,853 C80.2@4499,853 ; U11.16@4491,656 4496,651 v3(4511,651) C100.2@4538,651 ; U11.23@4514,775 v3(4538,775) C89.2@4558,775
  TopLayer w25: v1(4415,460) R79.1@4445,460 ; v1(4445,477) R79.1@4445,460 ; v1(4475,460) R79.1@4445,460 ; v1(4705,705) 4705,685 4725,665 4745,685 v1(4745,705)
  BottomLayer w10: v3(4142.8,480.1) 4319.9,480.1 4320,480
  other v1: 4329,660
  other v3: 4392,842
+24V: C46.2 C54.2 C56.2 C57.2 C74.2 D2.2 D7.2 D13.3 J3.1 K2.5 R16.2 R18.2 R26.1 R28.1 R29.1 R41.1 R42.1 TP5.1 U7.6 U8.8 | length 5694
  TopLayer w10: R29.1@2450,60 v1(2477,60) R28.1@2505,60 ; D7.2@2685,100 v1(2685,60) R26.1@2710,60 ; v3(2839,1260) R16.2@2860,1260
  TopLayer w15: C74.2@2920,1735 2905,1735 2895,1725 v1(2895,1685) U8.8@2945,1685
  TopLayer w20: v1(2550,1395) 2590,1395 R42.1@2600,1385 ; v1(2550,1425) R42.1@2600,1425 ; v1(2550,1455) 2595,1455 R42.1@2605,1465 ; R18.2@3194,101 3248,101 3255,108 3255,245 D2.2@3225,275 ; v1(3515,345) v1(3595,345) ; v1@3520,390 C56.2@3555,390 ; C56.2@3555,355 C56.2@3555,390 ; v1(3555,425) C56.2@3555,390 ; v1(3595,390) C56.2@3555,390 ; D13.3@3702,2140 D13.3@3712,2140 v1(3750,2140) ; v1@3711,240 3755,240 ; R41.1@3755,210 3755,240 ; C46.2@3755,270 3755,240 ; U7.6@3825,240 v1(3780,240) 3755,240
  TopLayer w50: D2.2@3227,278 3642,278 3680,240 v1(3710,240) v1@3711,240 ; C57.2@3335,182 C54.2@3335,275
  BottomLayer w10: v1(2550,1395) 2550,1375 2568,1357 2828,1357 2855,1330 2855,1276 v3(2839,1260)
  BottomLayer w15: J3.1@2926,2065 TP5.1@2926,2155
  BottomLayer w20: 2875,1915 2875,1870 2910,1835 2910,1700 v1(2895,1685)
  BottomLayer w50: 2600,400 2600,810 2350,1060 2350,1150 2315,1185 2315,1330 2410,1425 v1(2550,1425) 2580,1425 2635,1480 2635,1825 2730,1920 2885,1920 2925,1960 J3.1@2925,2060 2925,2065 2926,2065 3015,2065 3090,2140 v1(3750,2140) 3760,2140 K2.5@3855,2045
  other v1: 3060,175 3200,180 3245,180 3155,210 3095,230 3155,255 3515,280 3595,280 3155,295 3095,315 3155,340 3200,370 3245,370 3060,375 3515,390